# Altium PCB Routed BOARD 3.pcbdoc (part 1 of 7)
Units mil, origin at the board's own origin, x right, y up, seen from the top; angles counter-clockwise.
Board outline 6225 x 7025 mil, 8 copper layers (TopLayer, MidLayer1, MidLayer2, MidLayer3, MidLayer4, MidLayer5, MidLayer6, BottomLayer); 253 components, 548 nets, 2588 pads, 2014 vias.
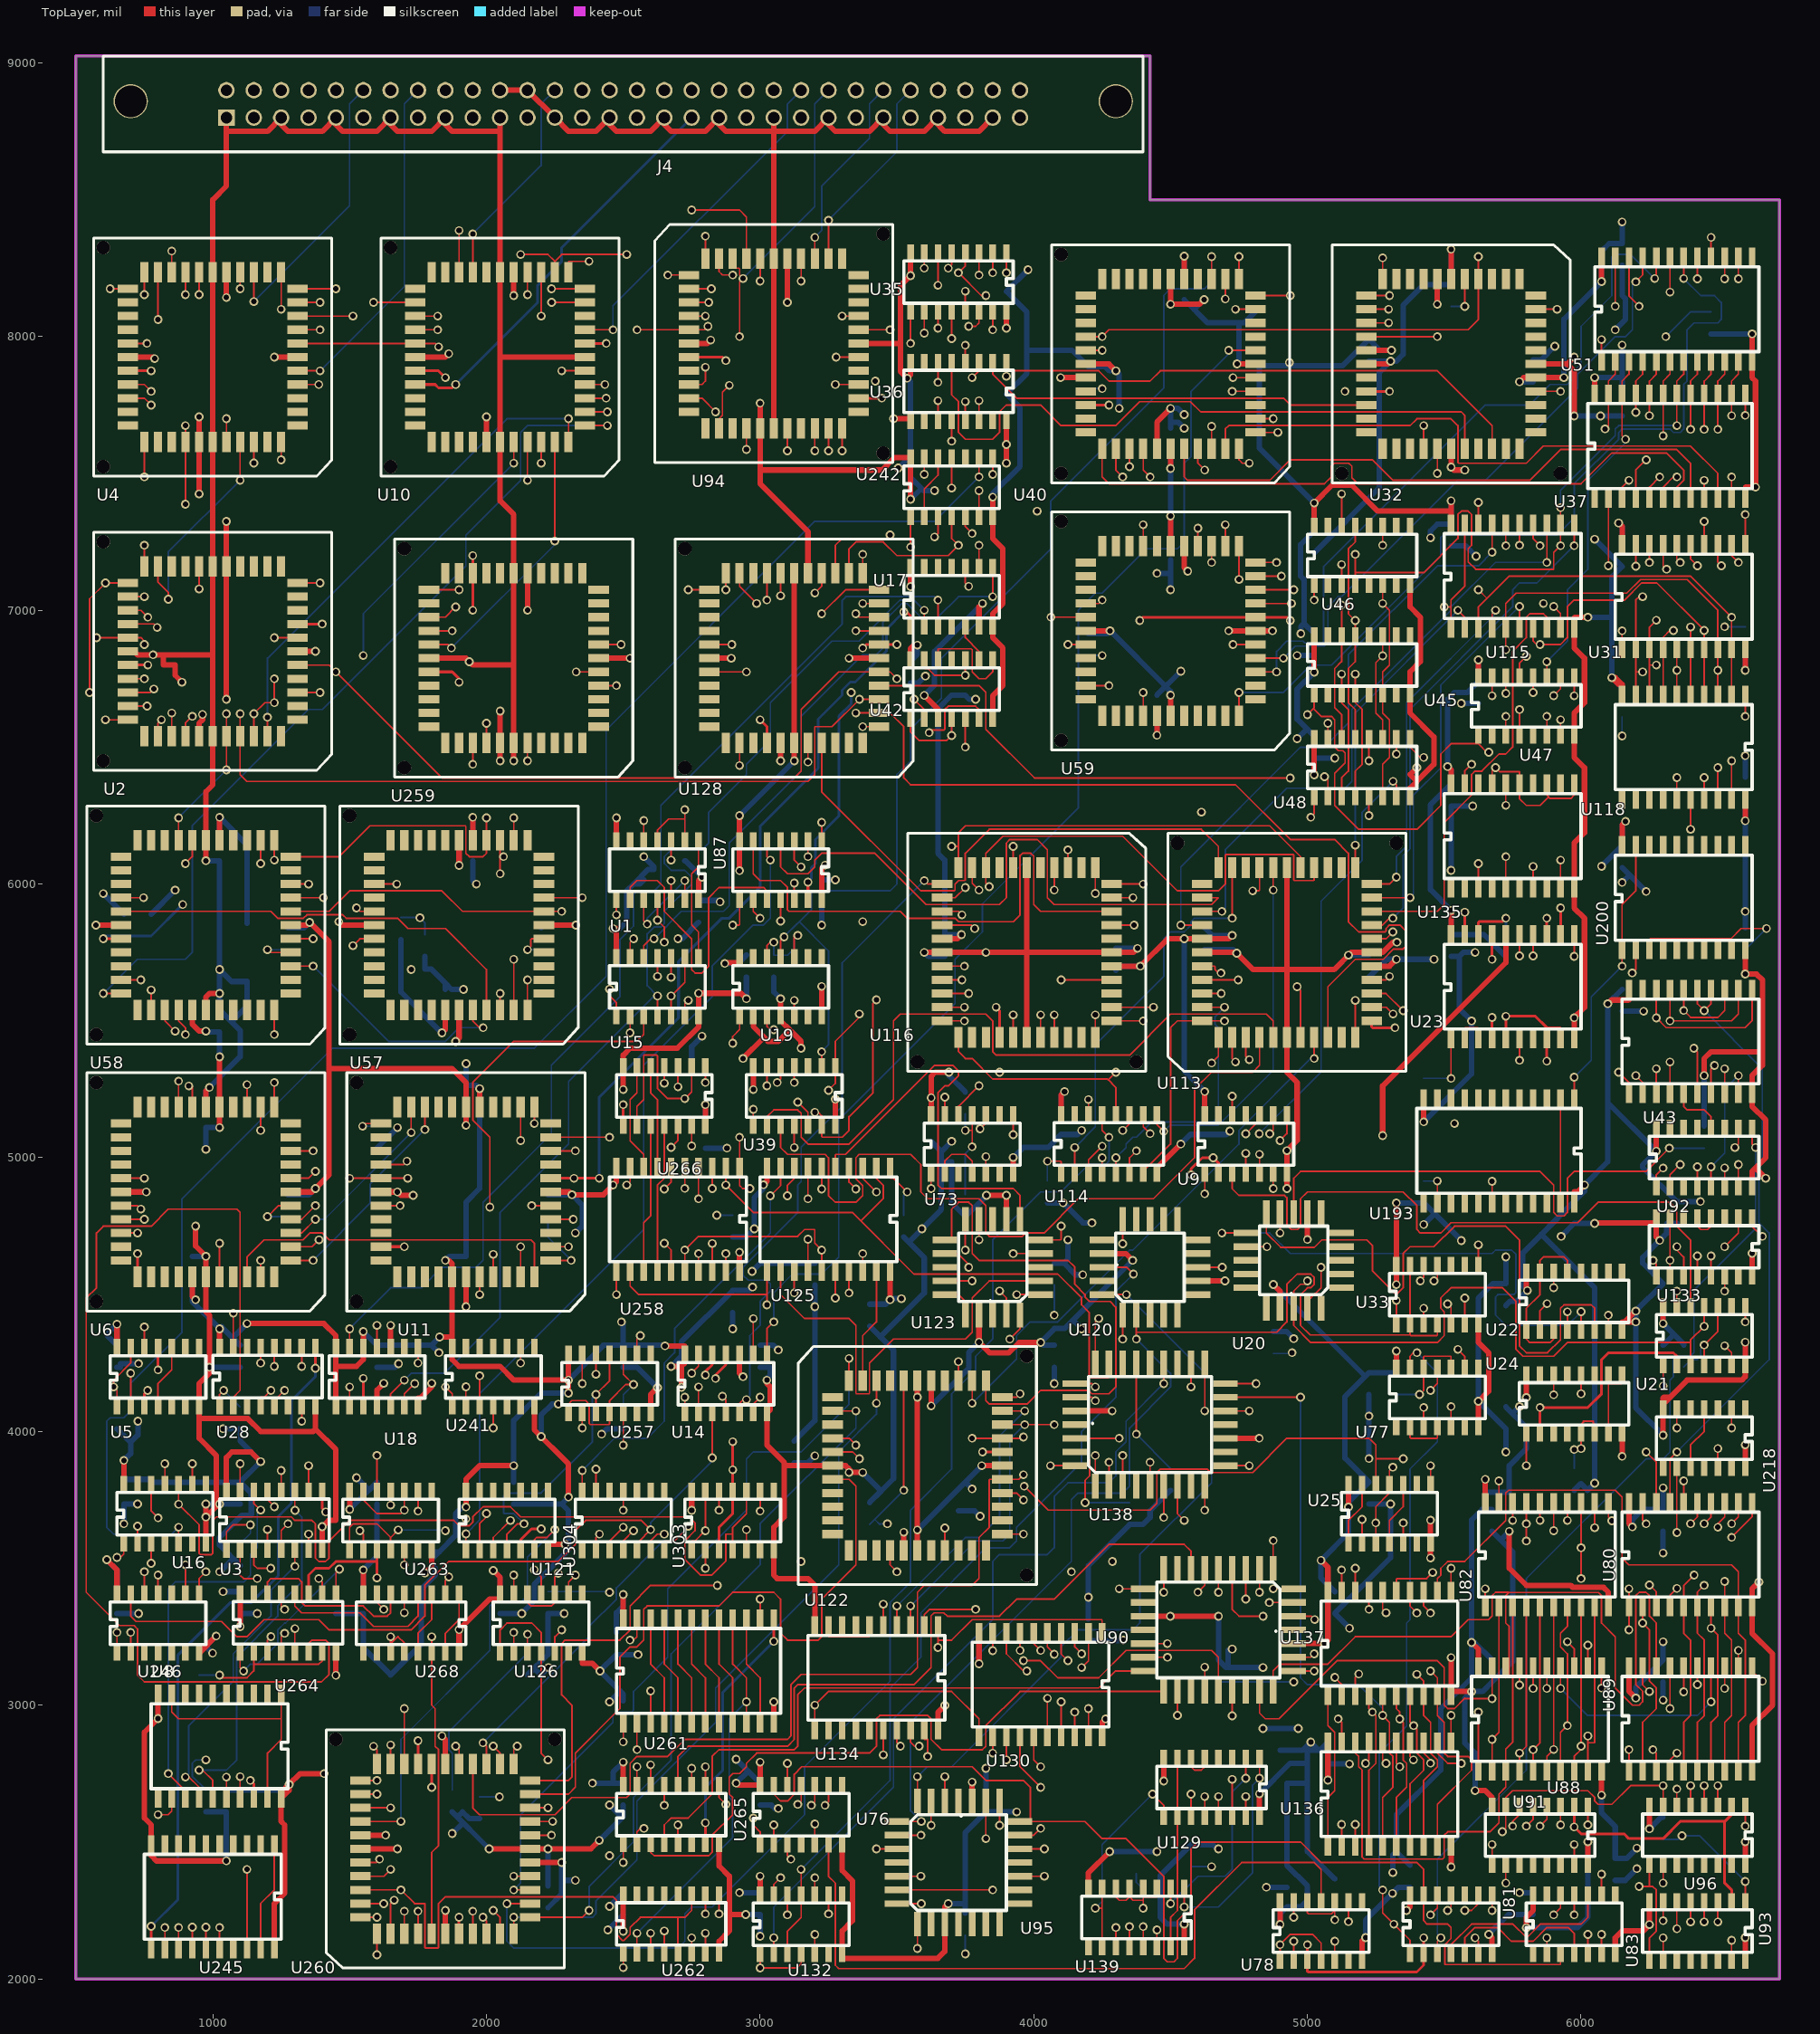
[diagram p0: TopLayer view]
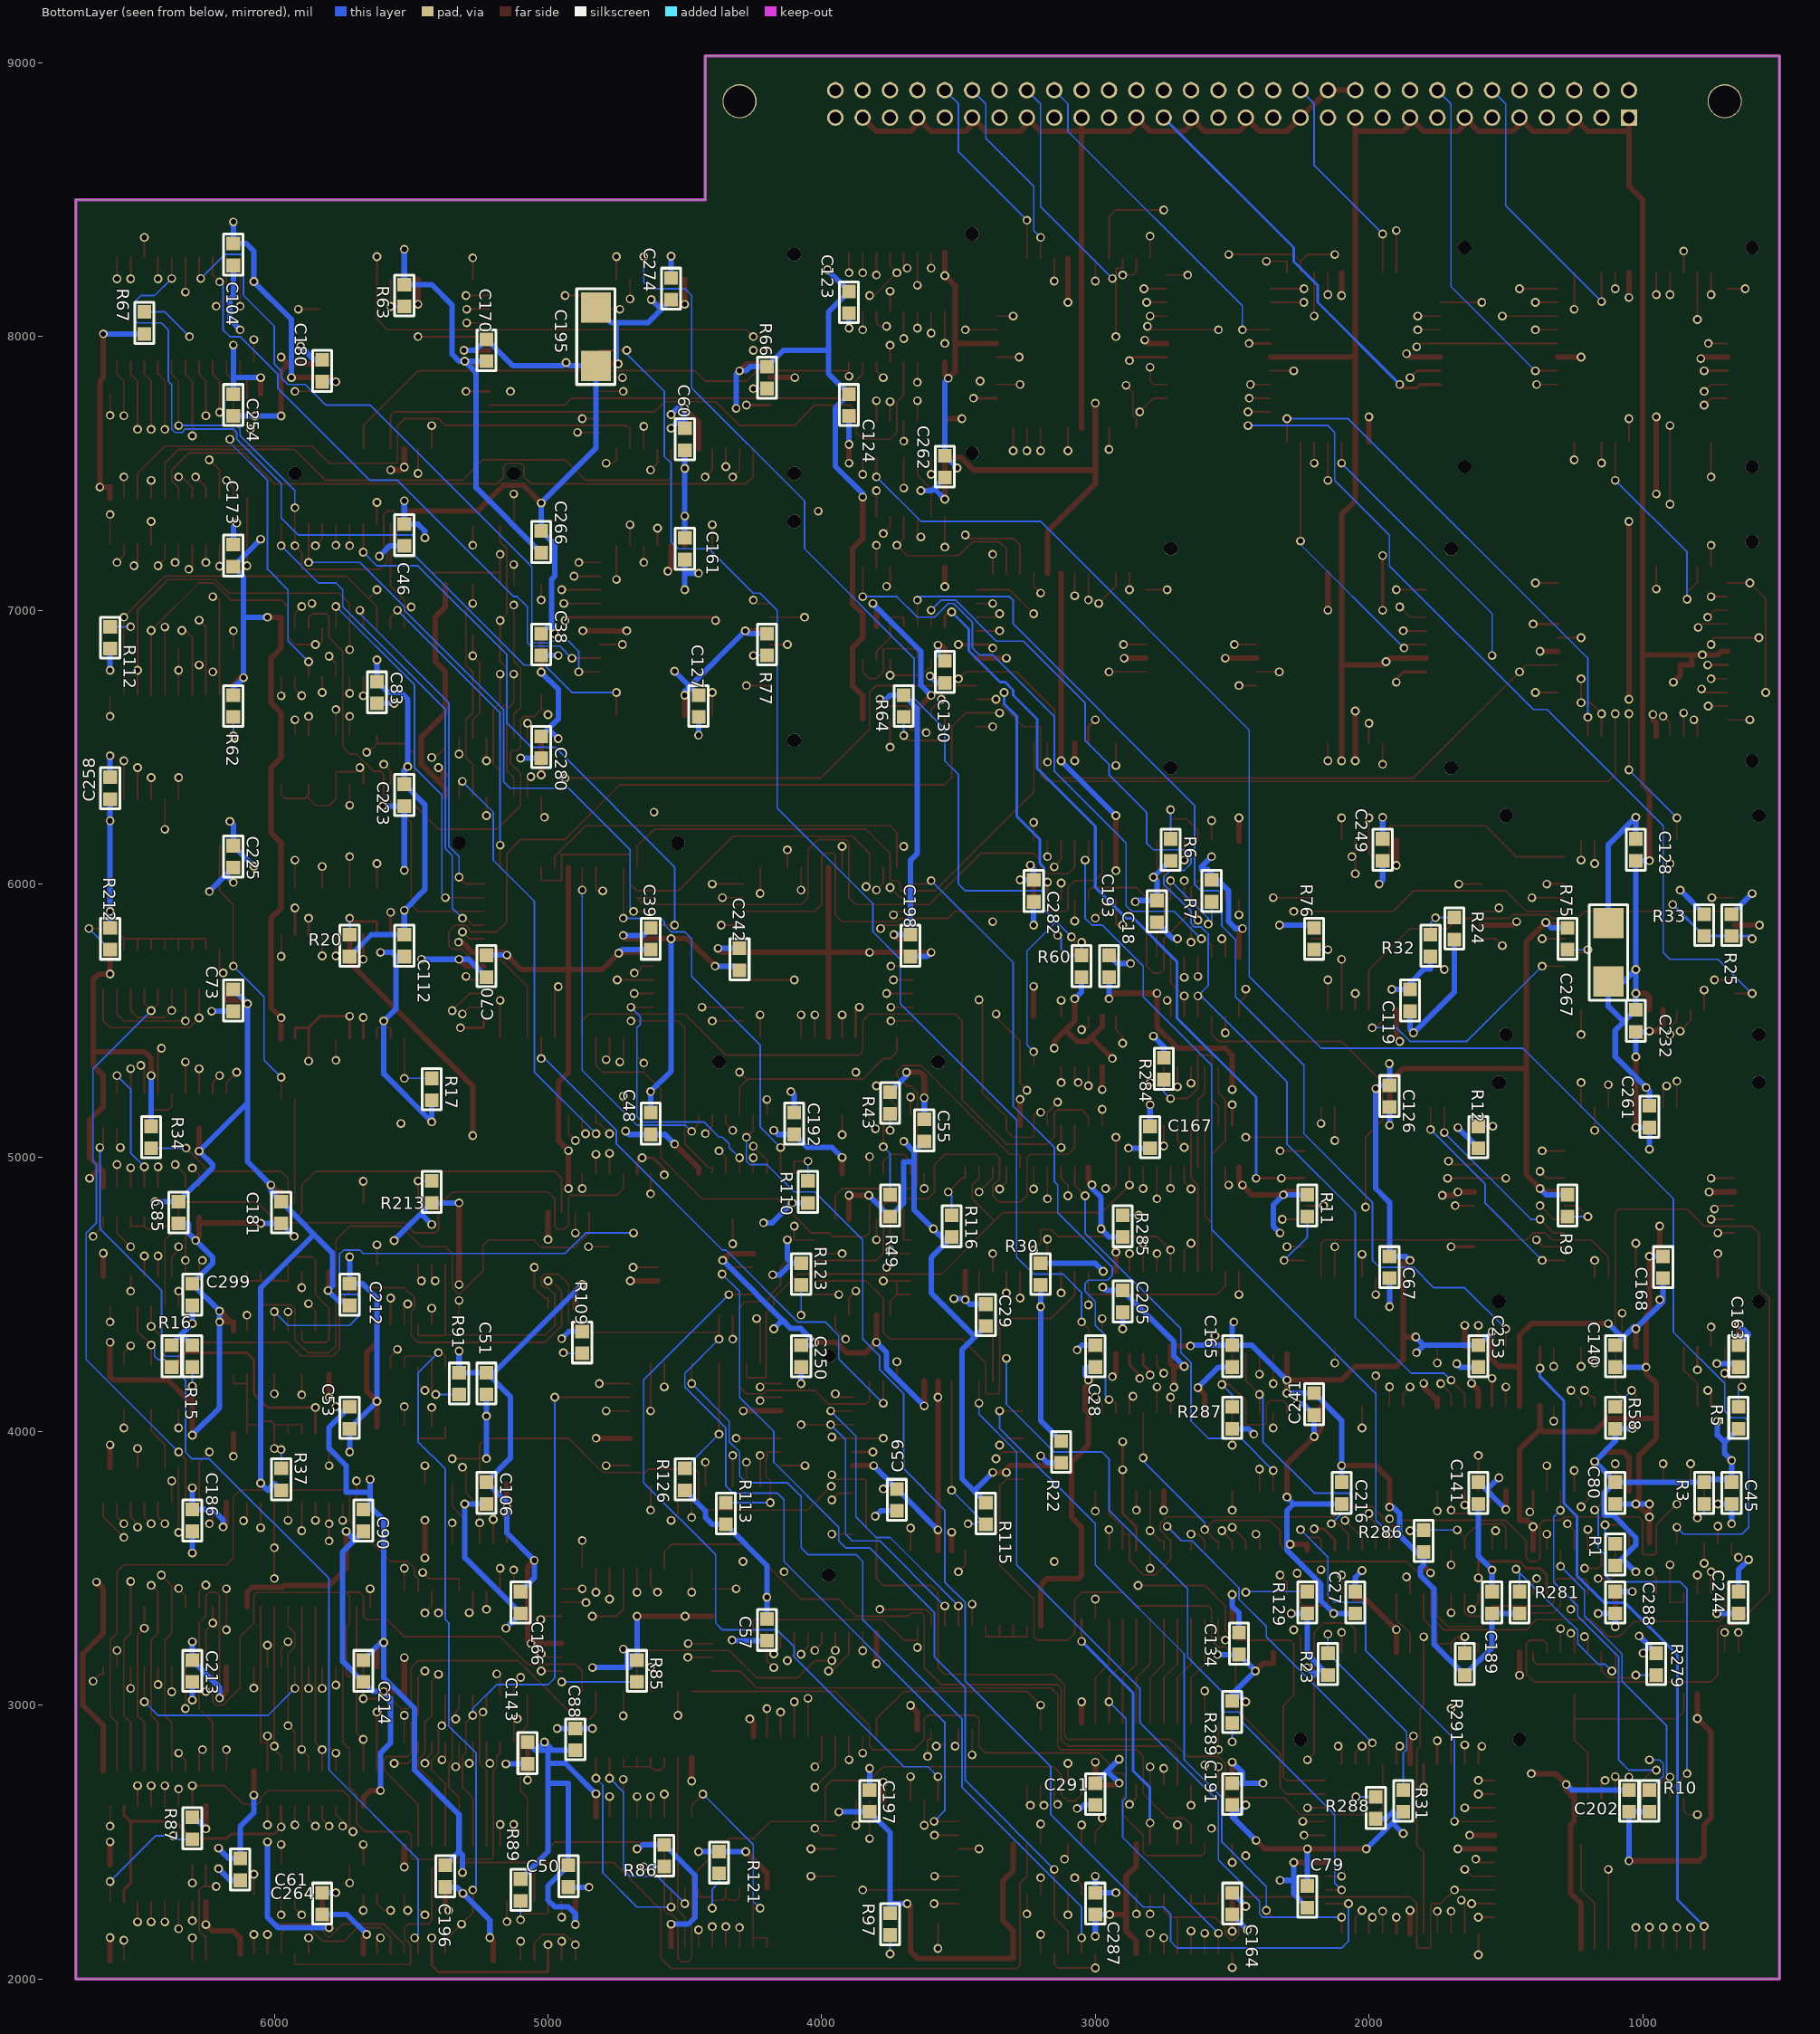
[diagram p1: BottomLayer view, seen from below]
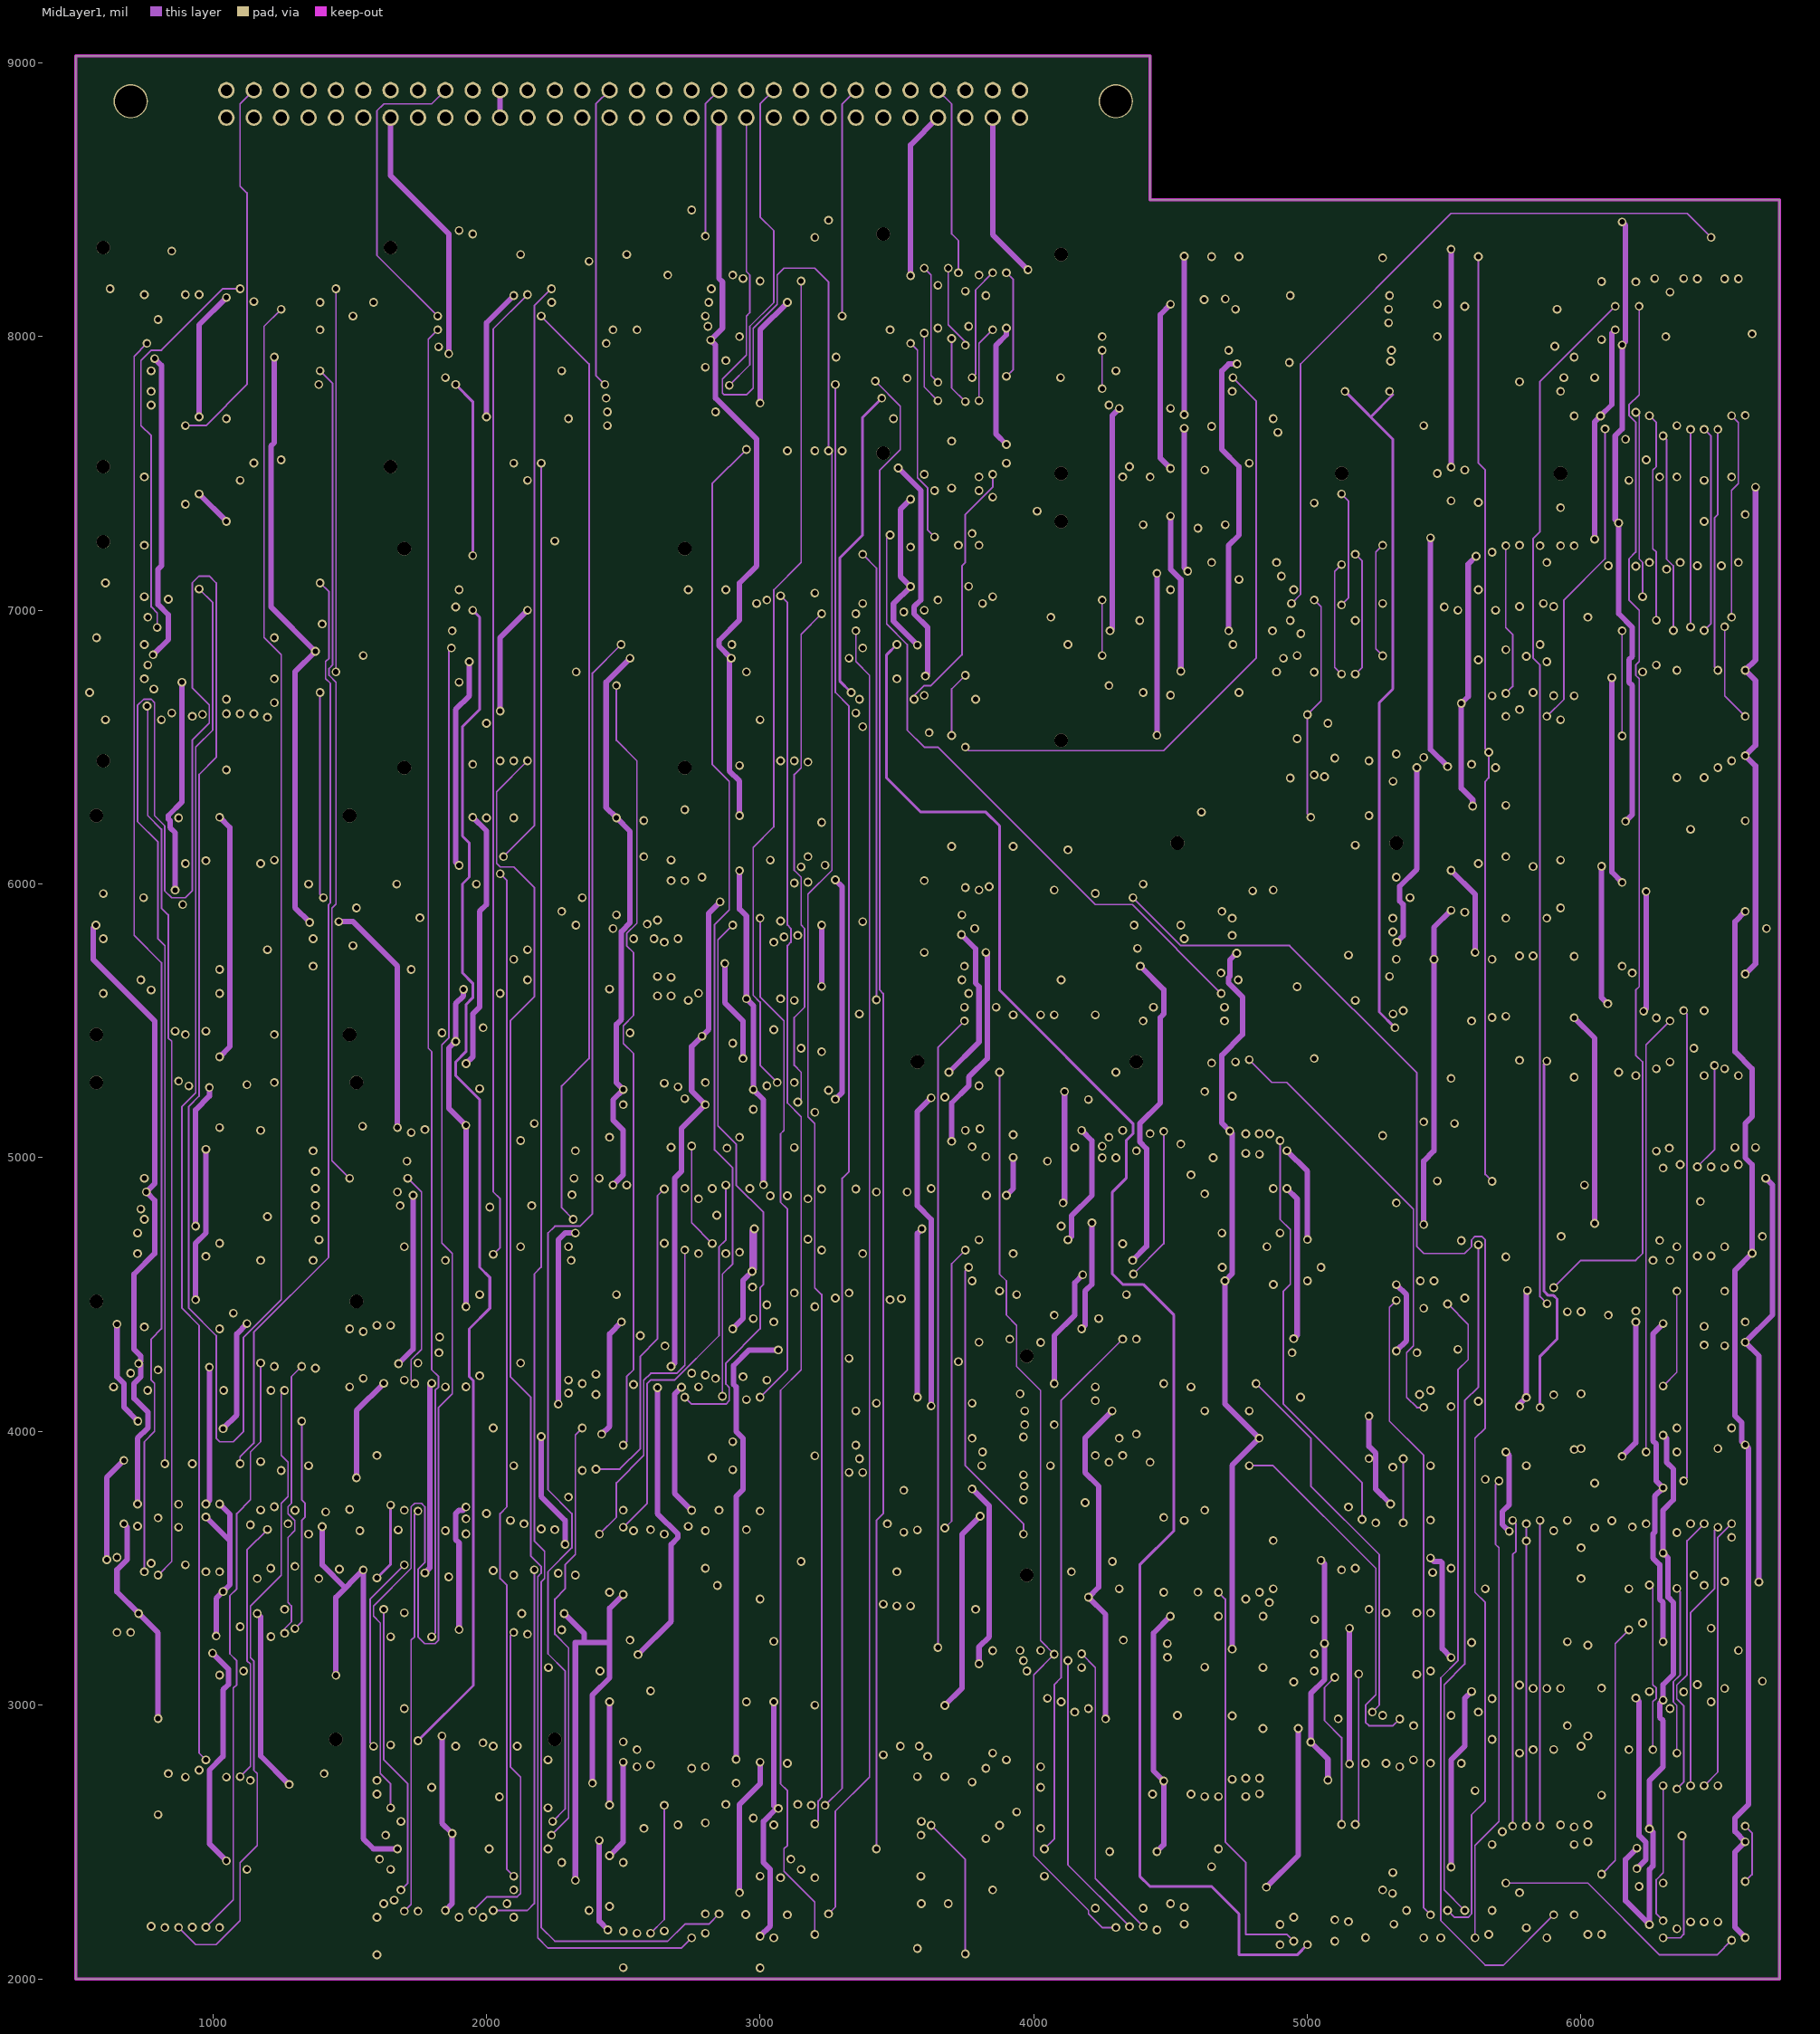
[diagram p2: MidLayer1]
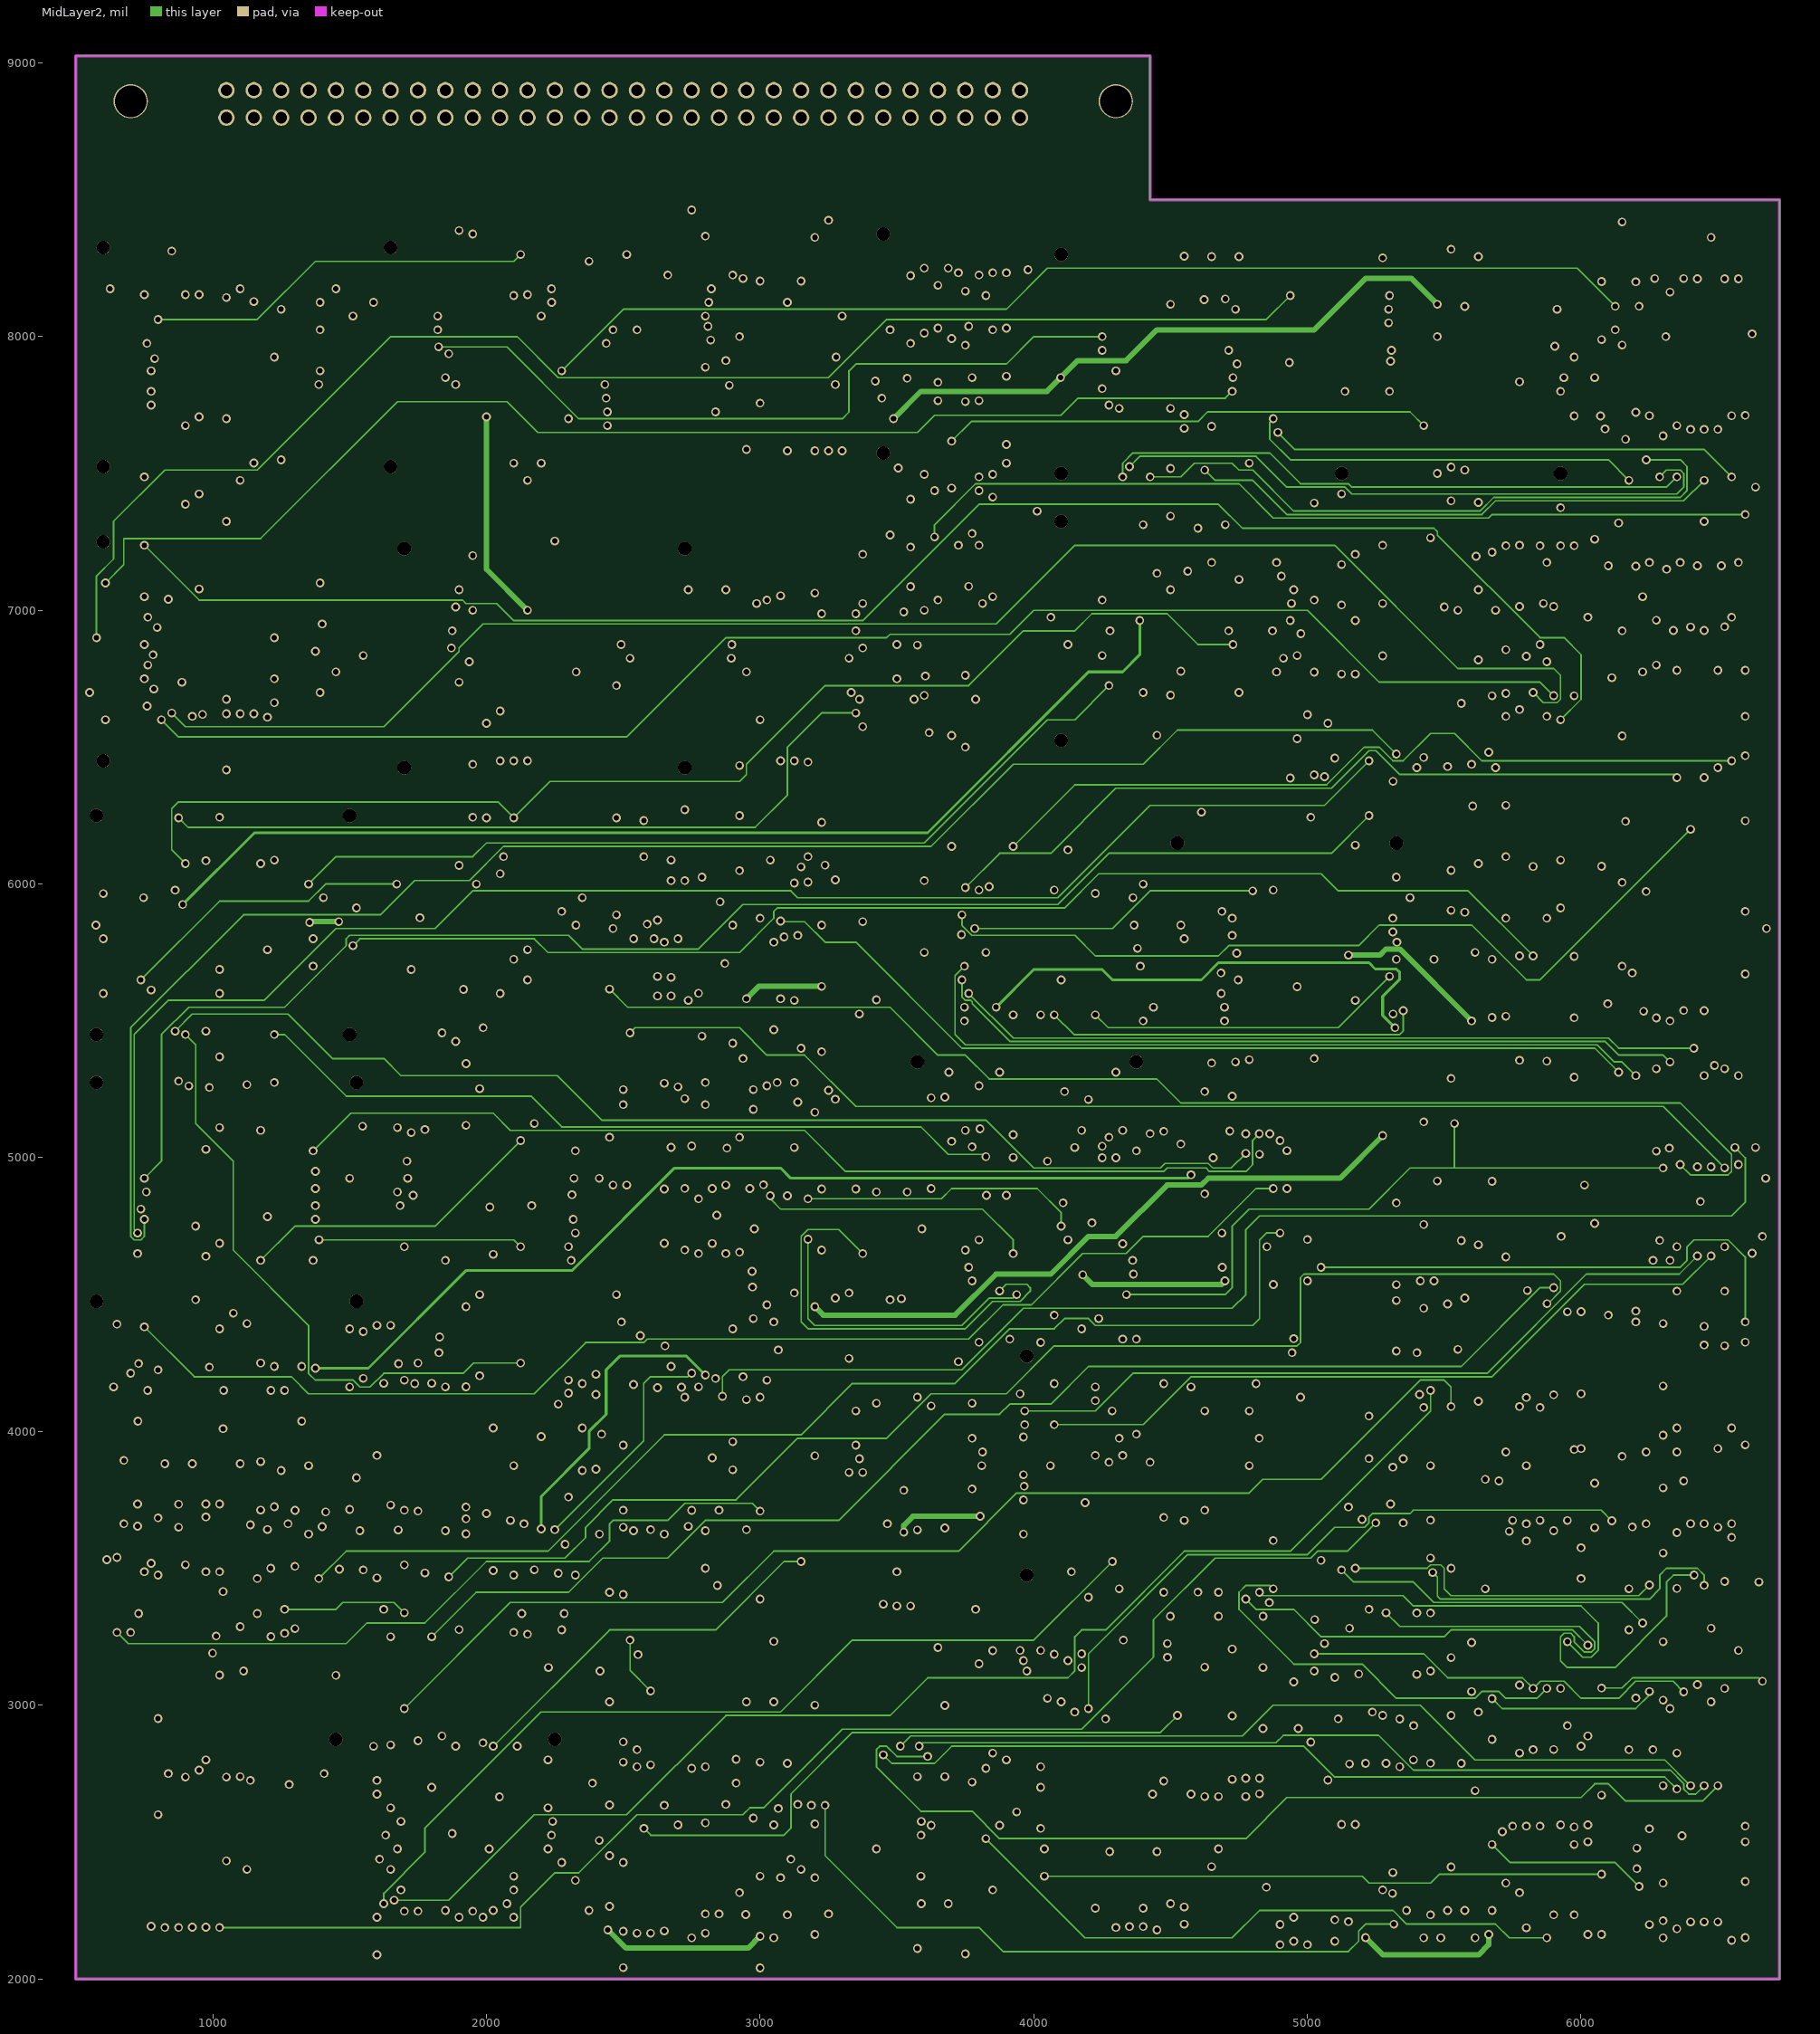
[diagram p3: MidLayer2]
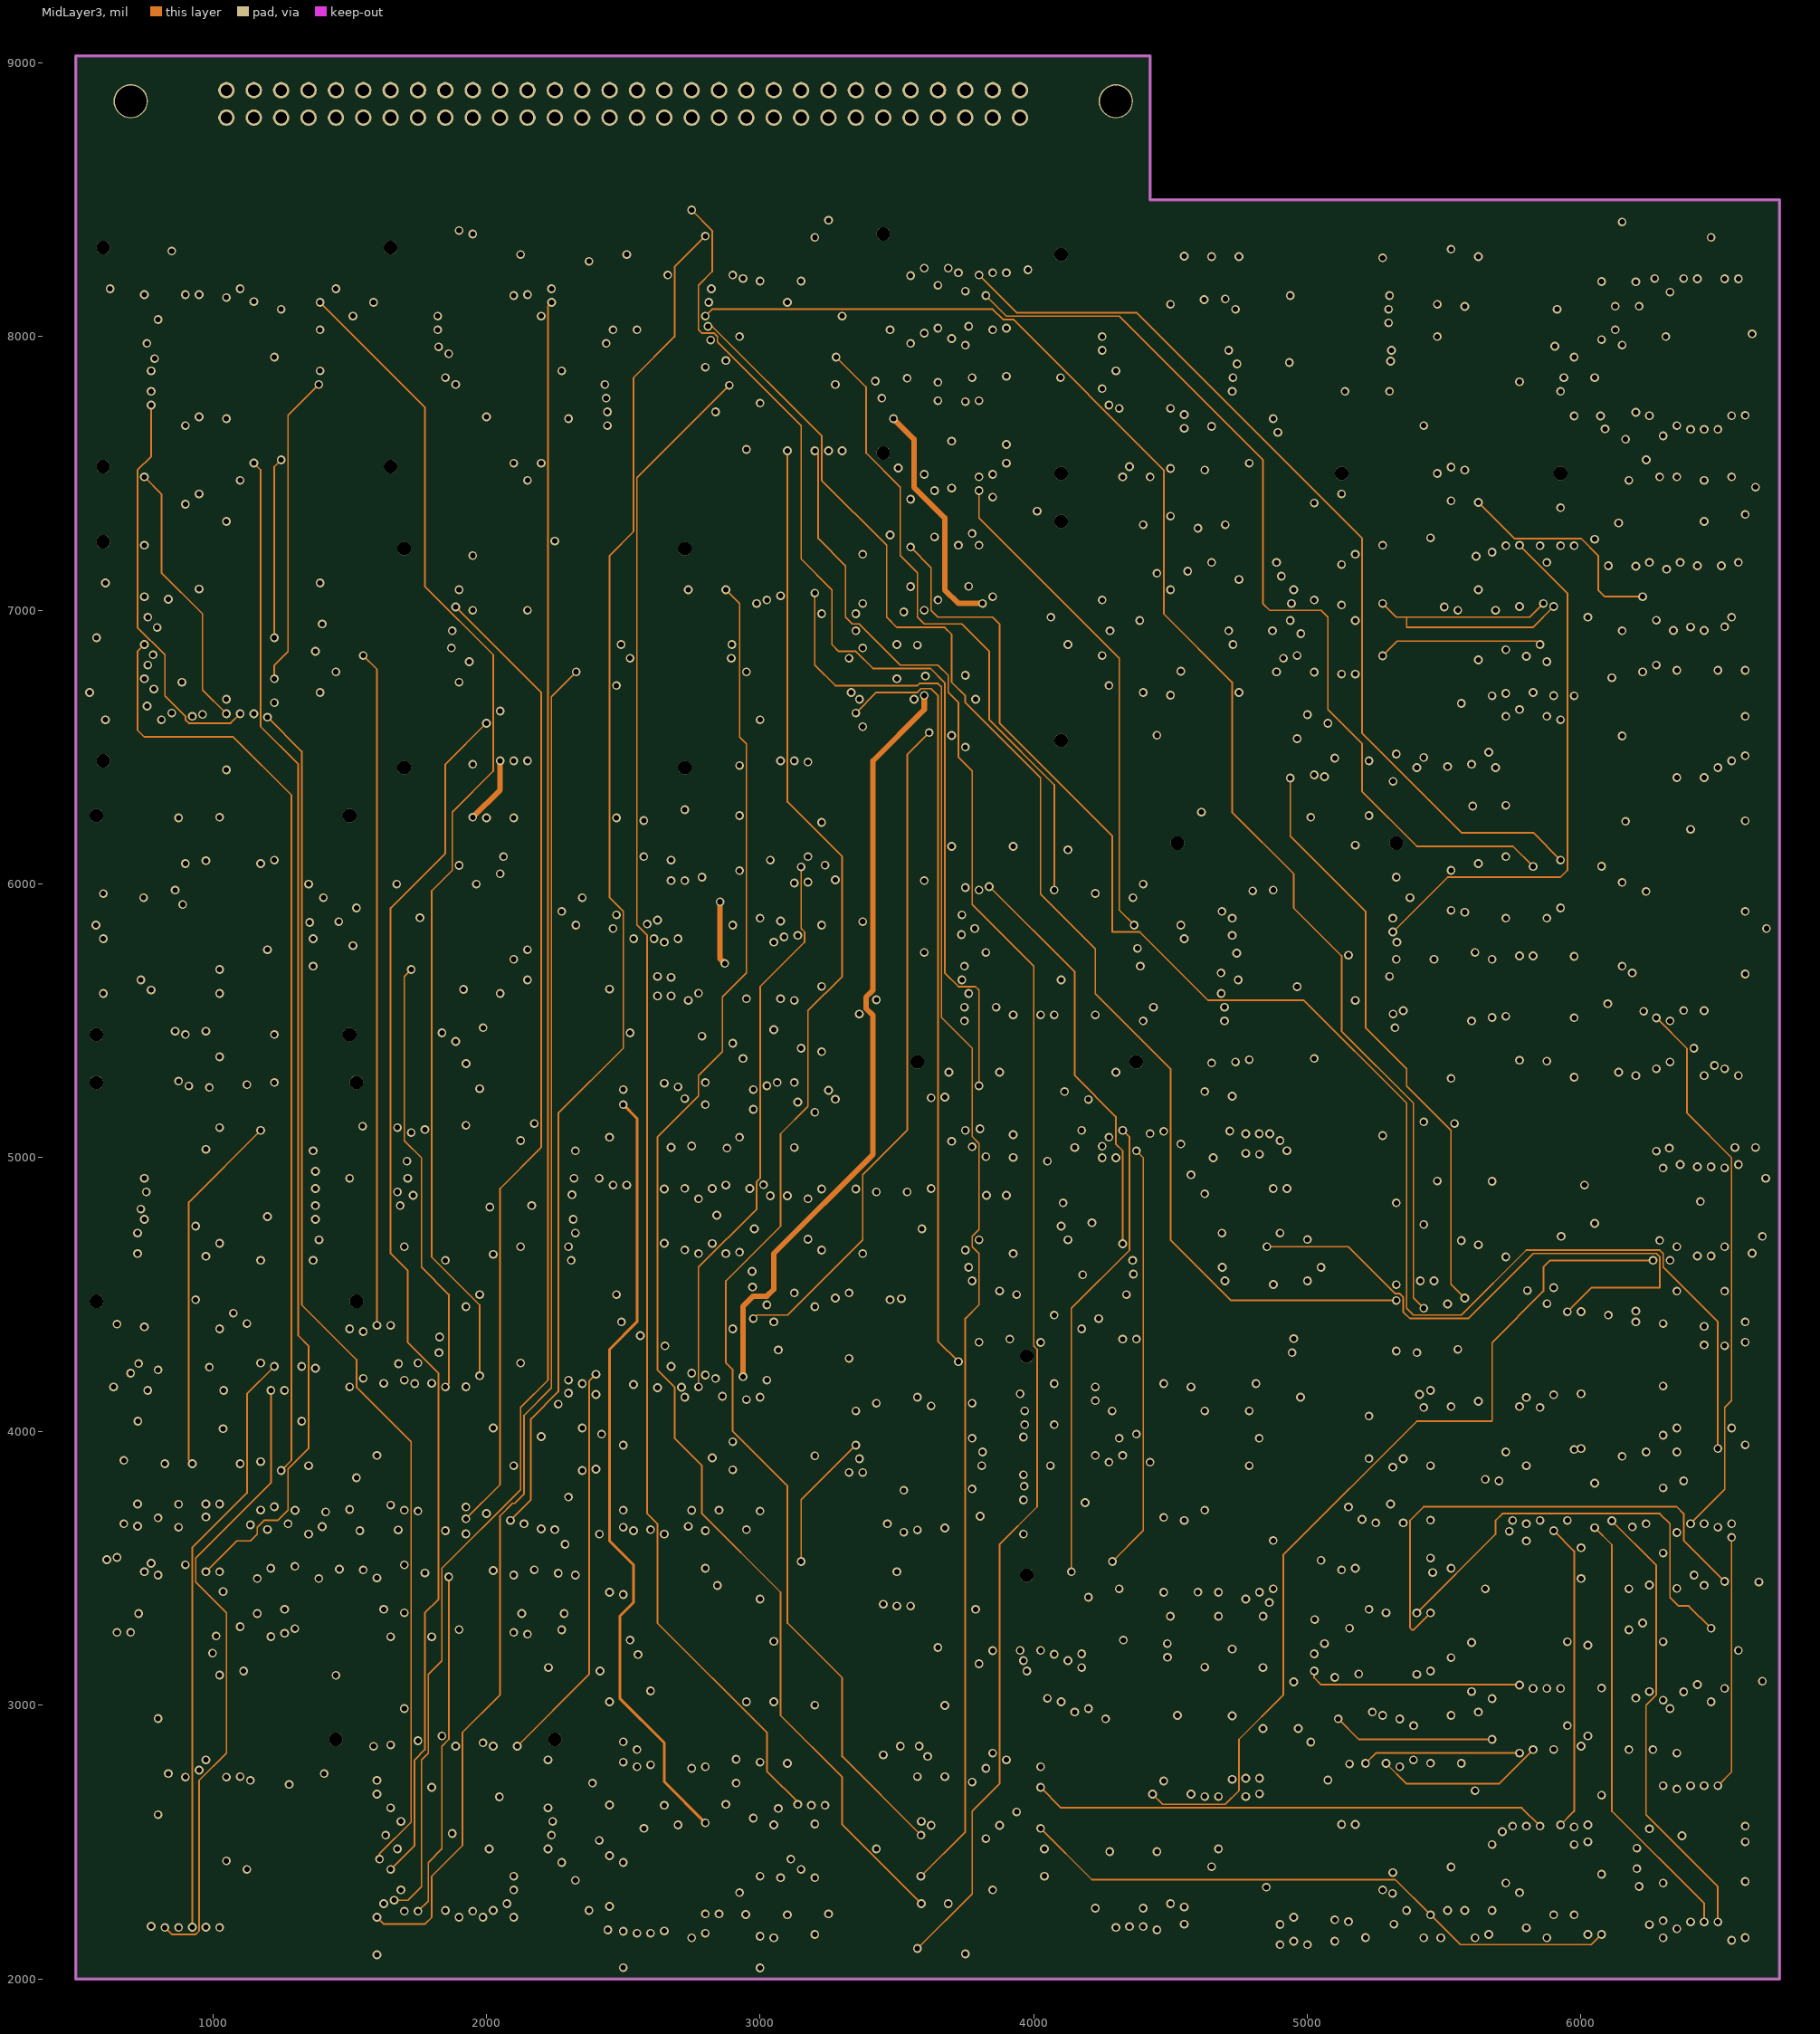
[diagram p4: MidLayer3]
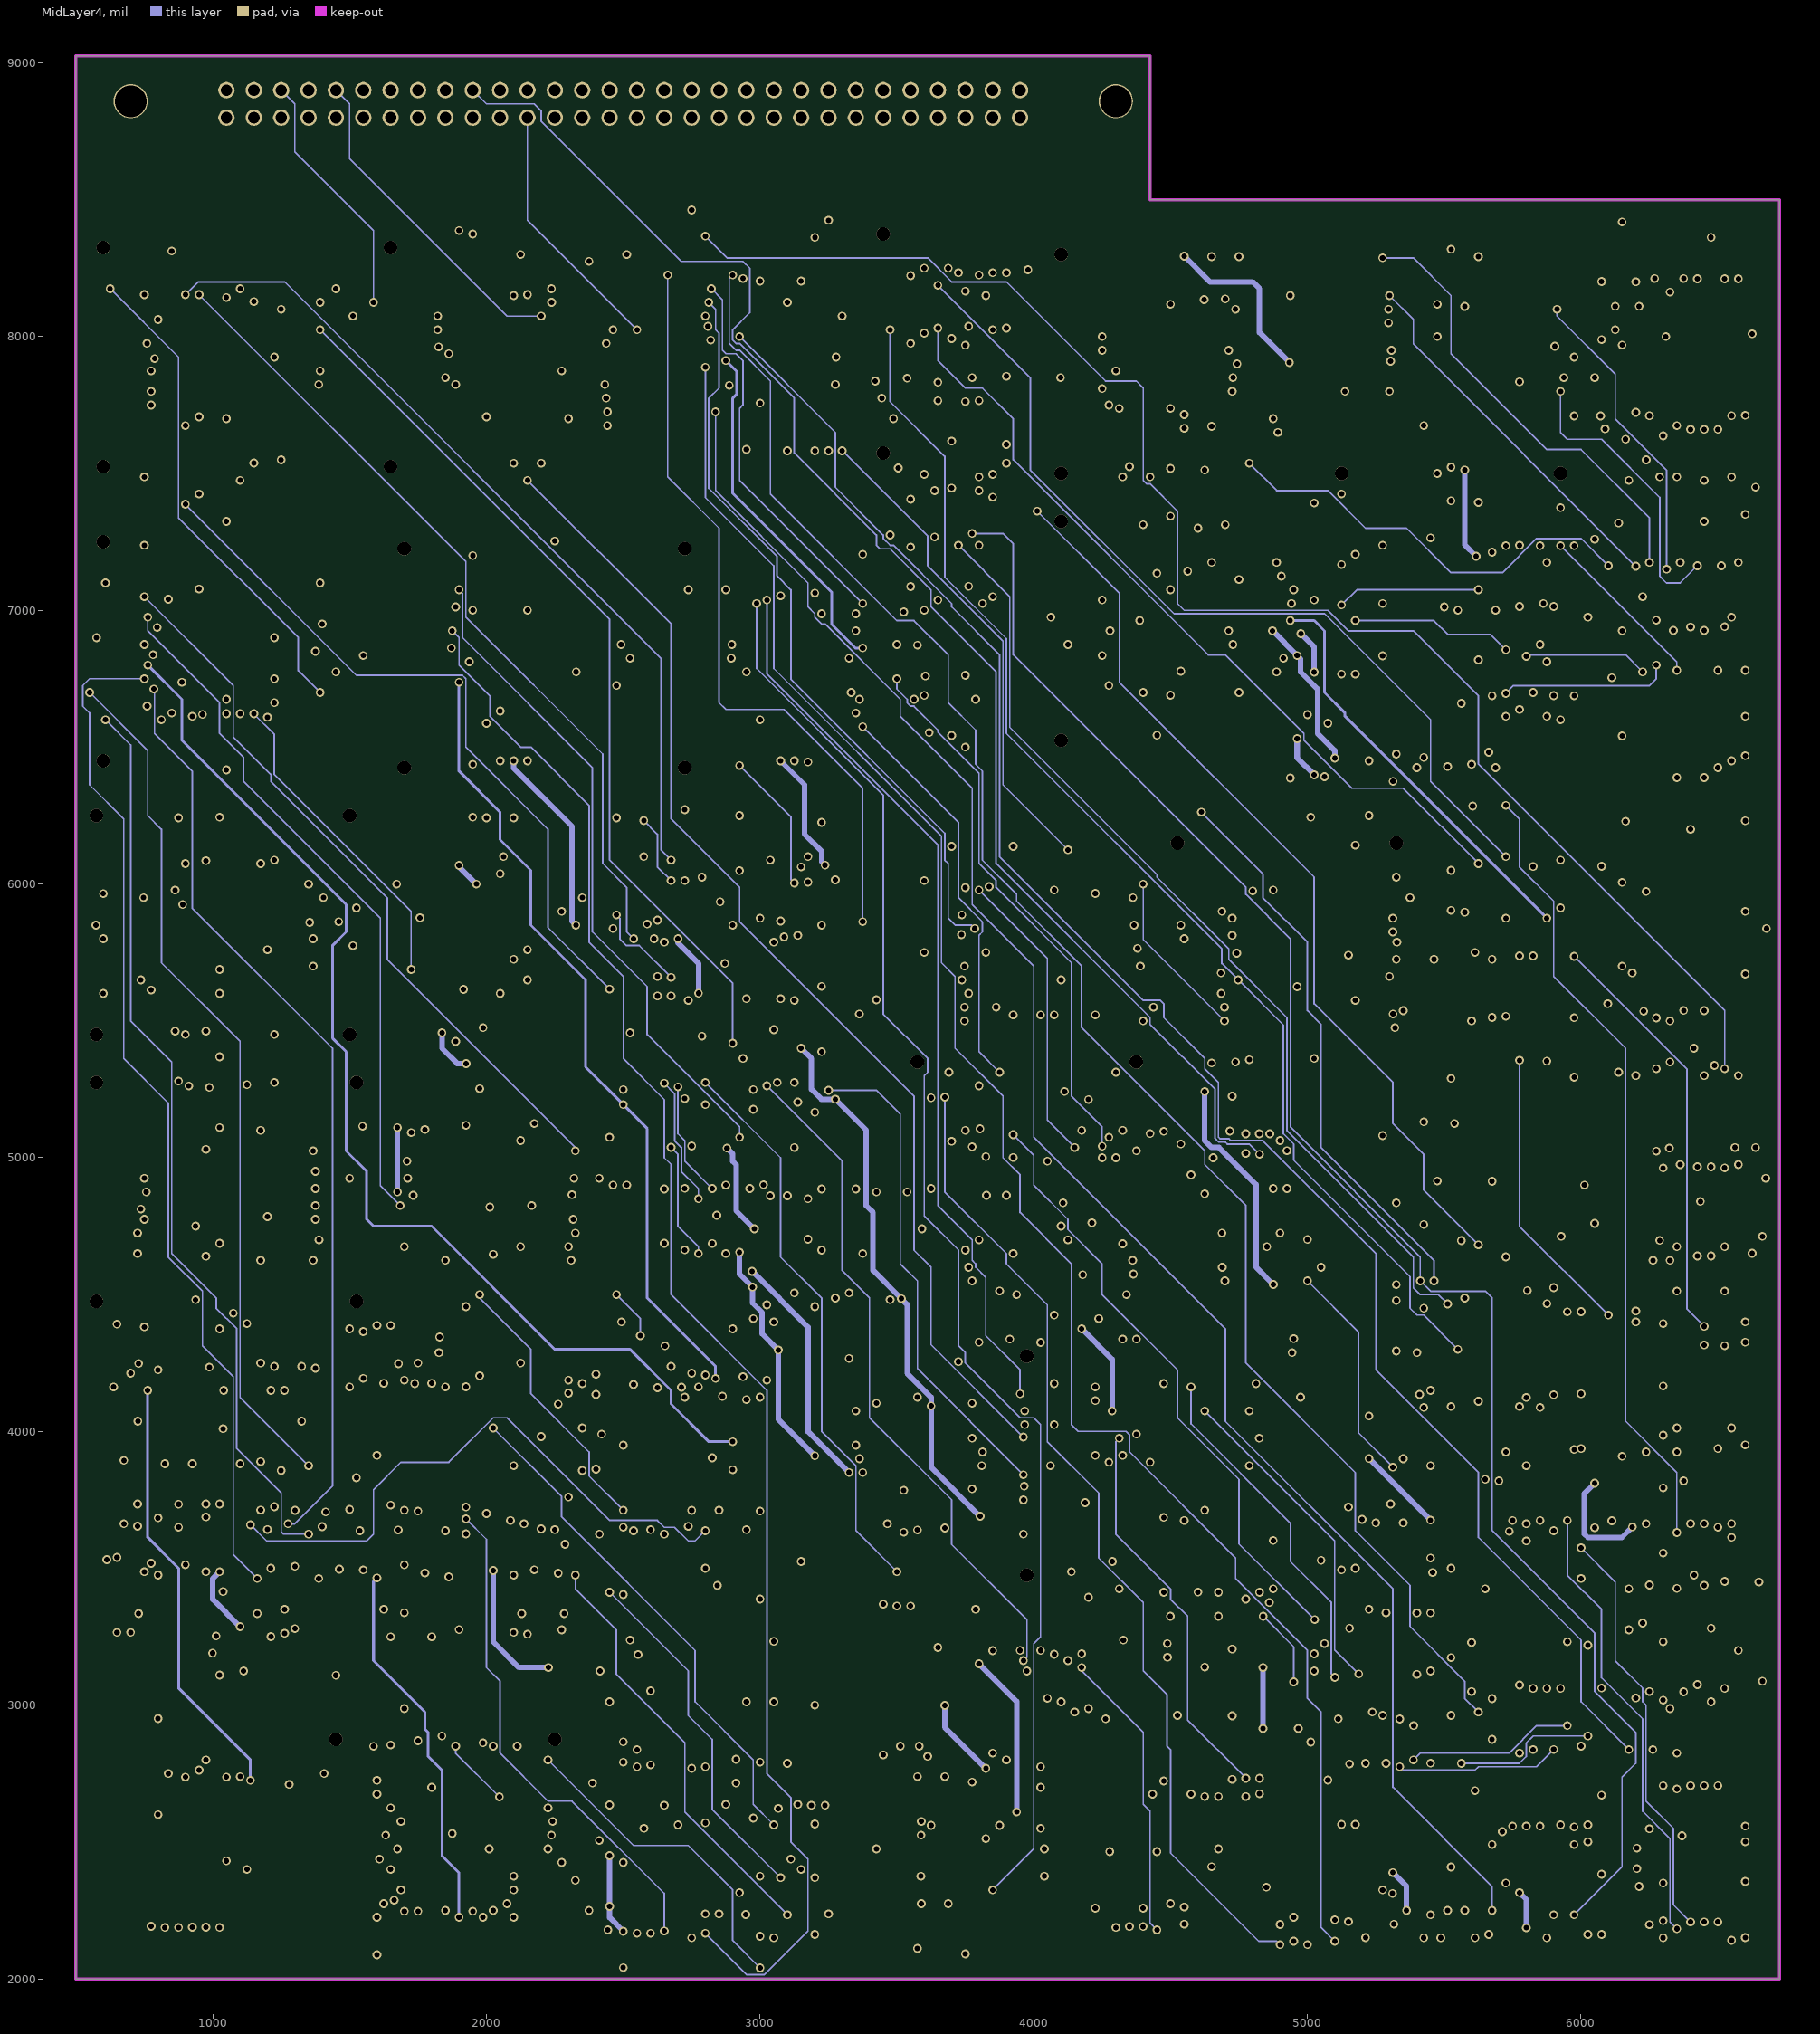
[diagram p5: MidLayer4]
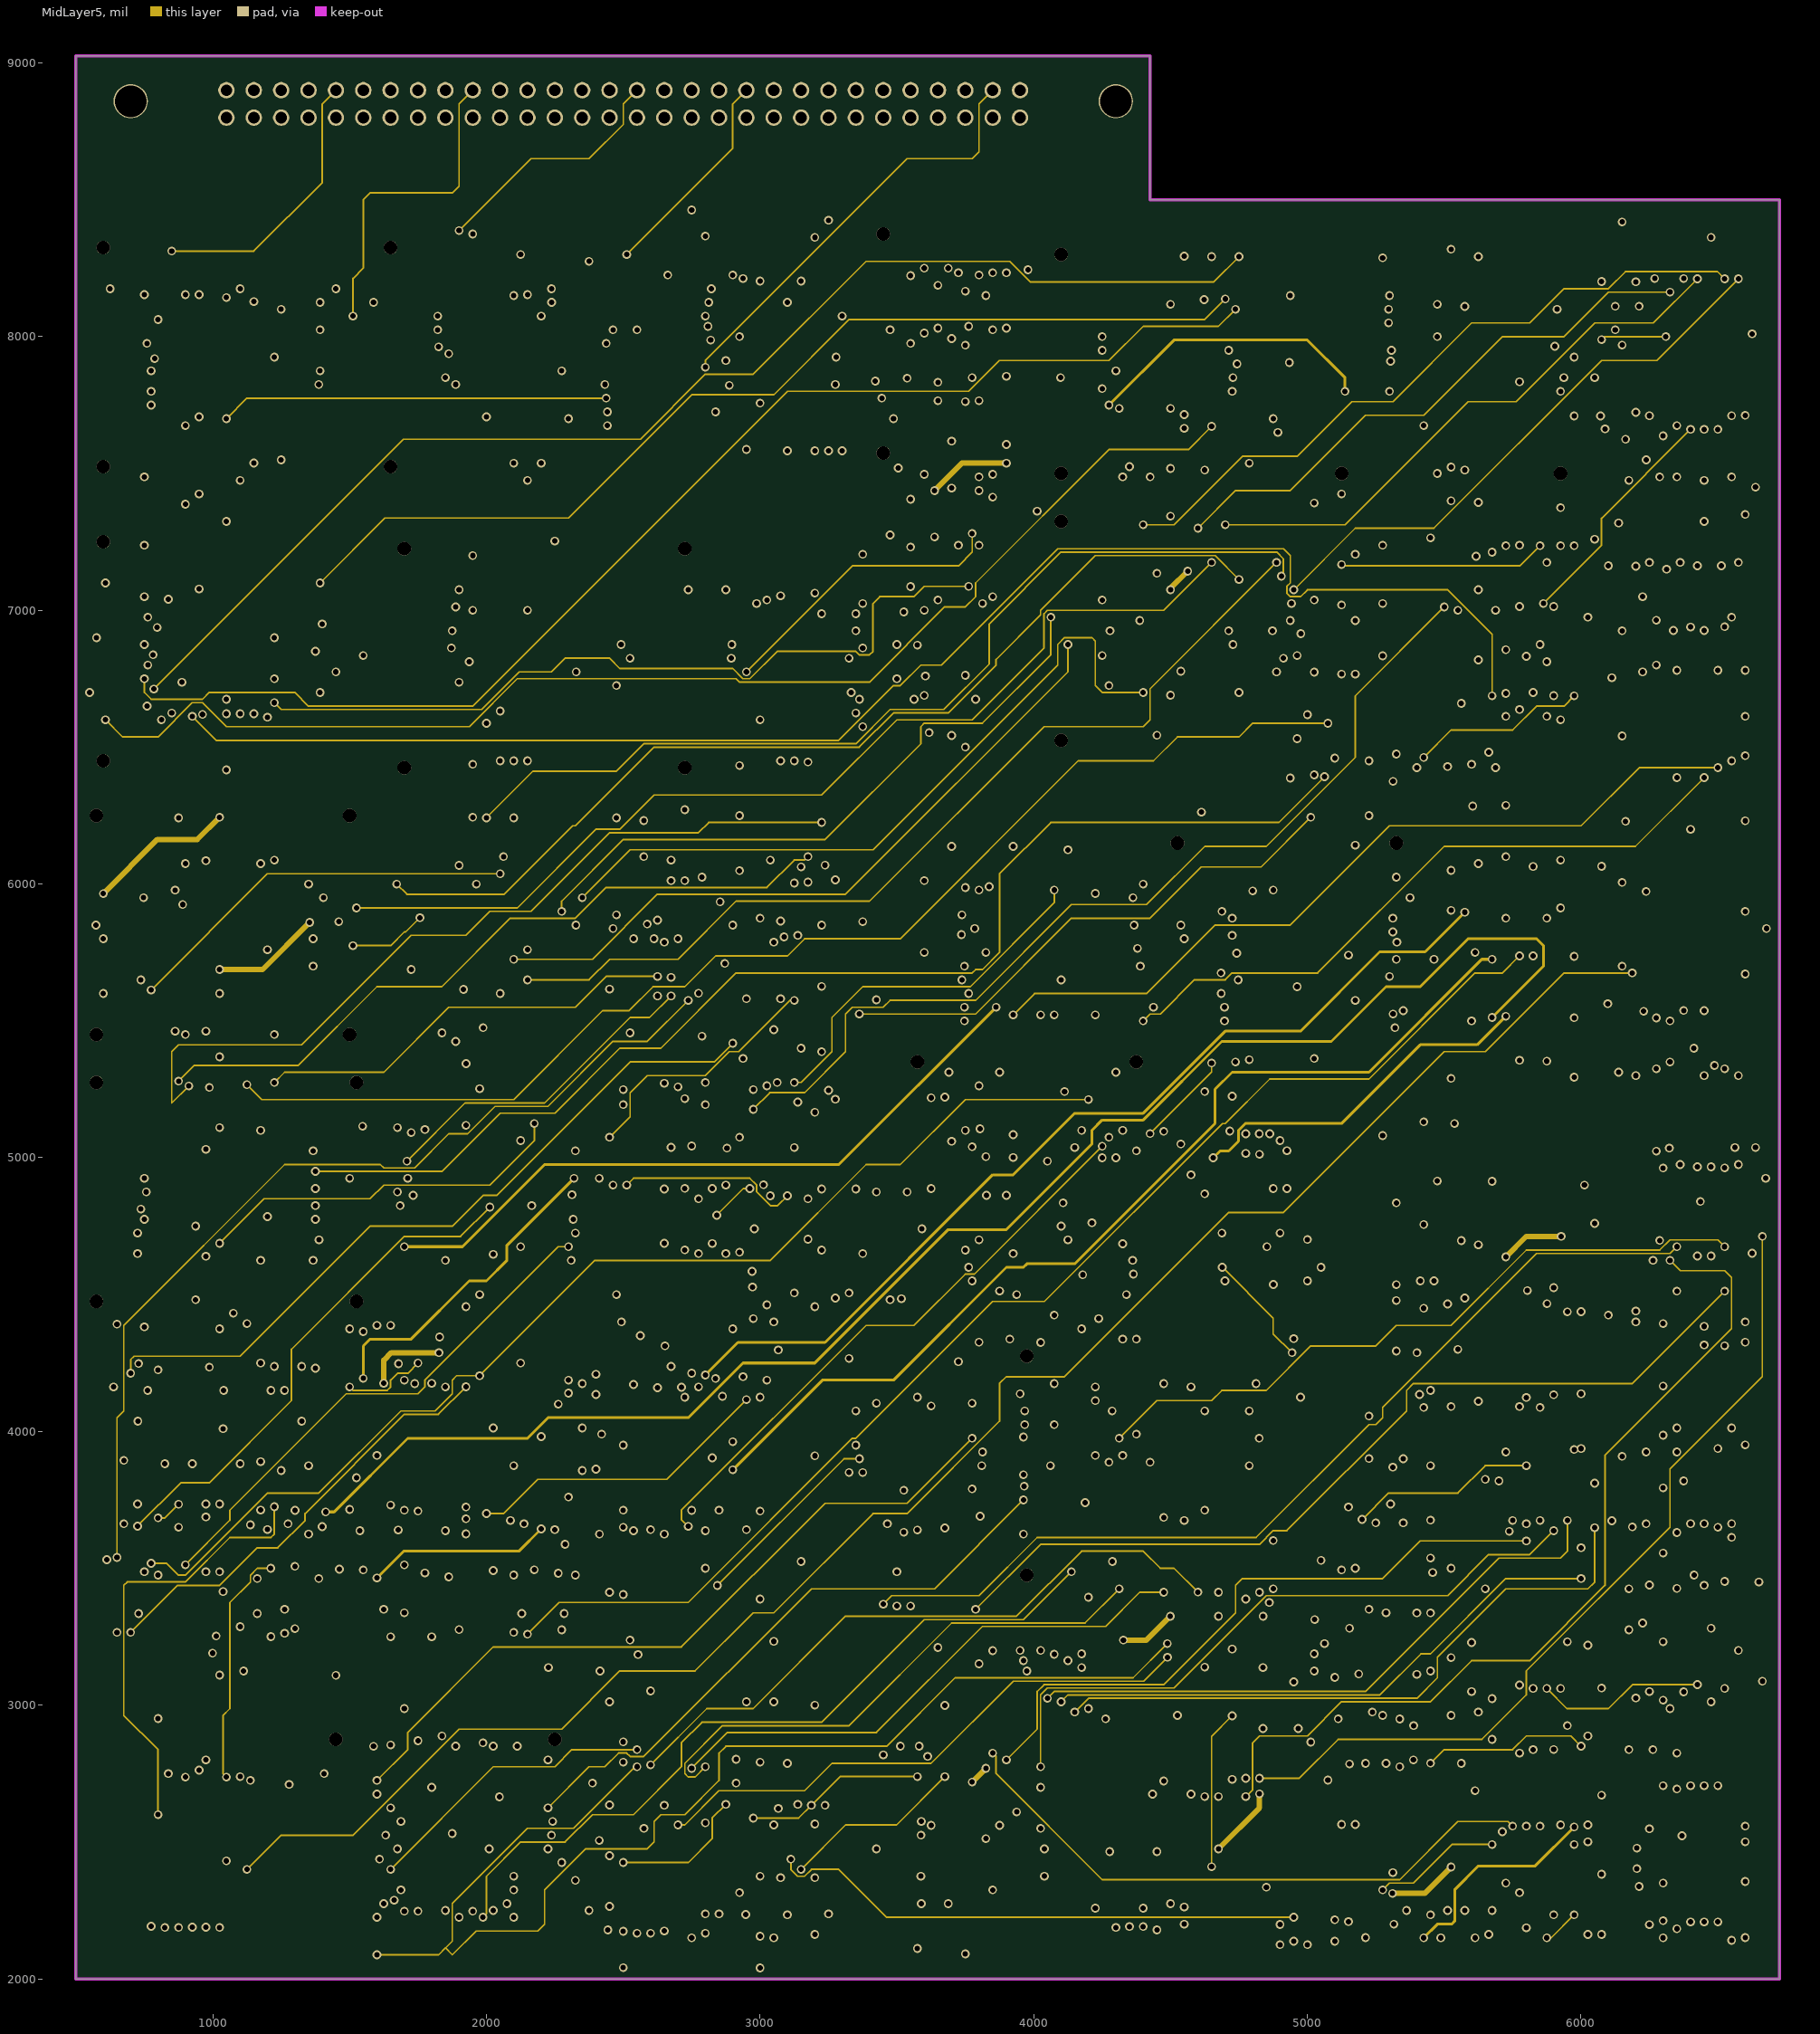
[diagram p6: MidLayer5]
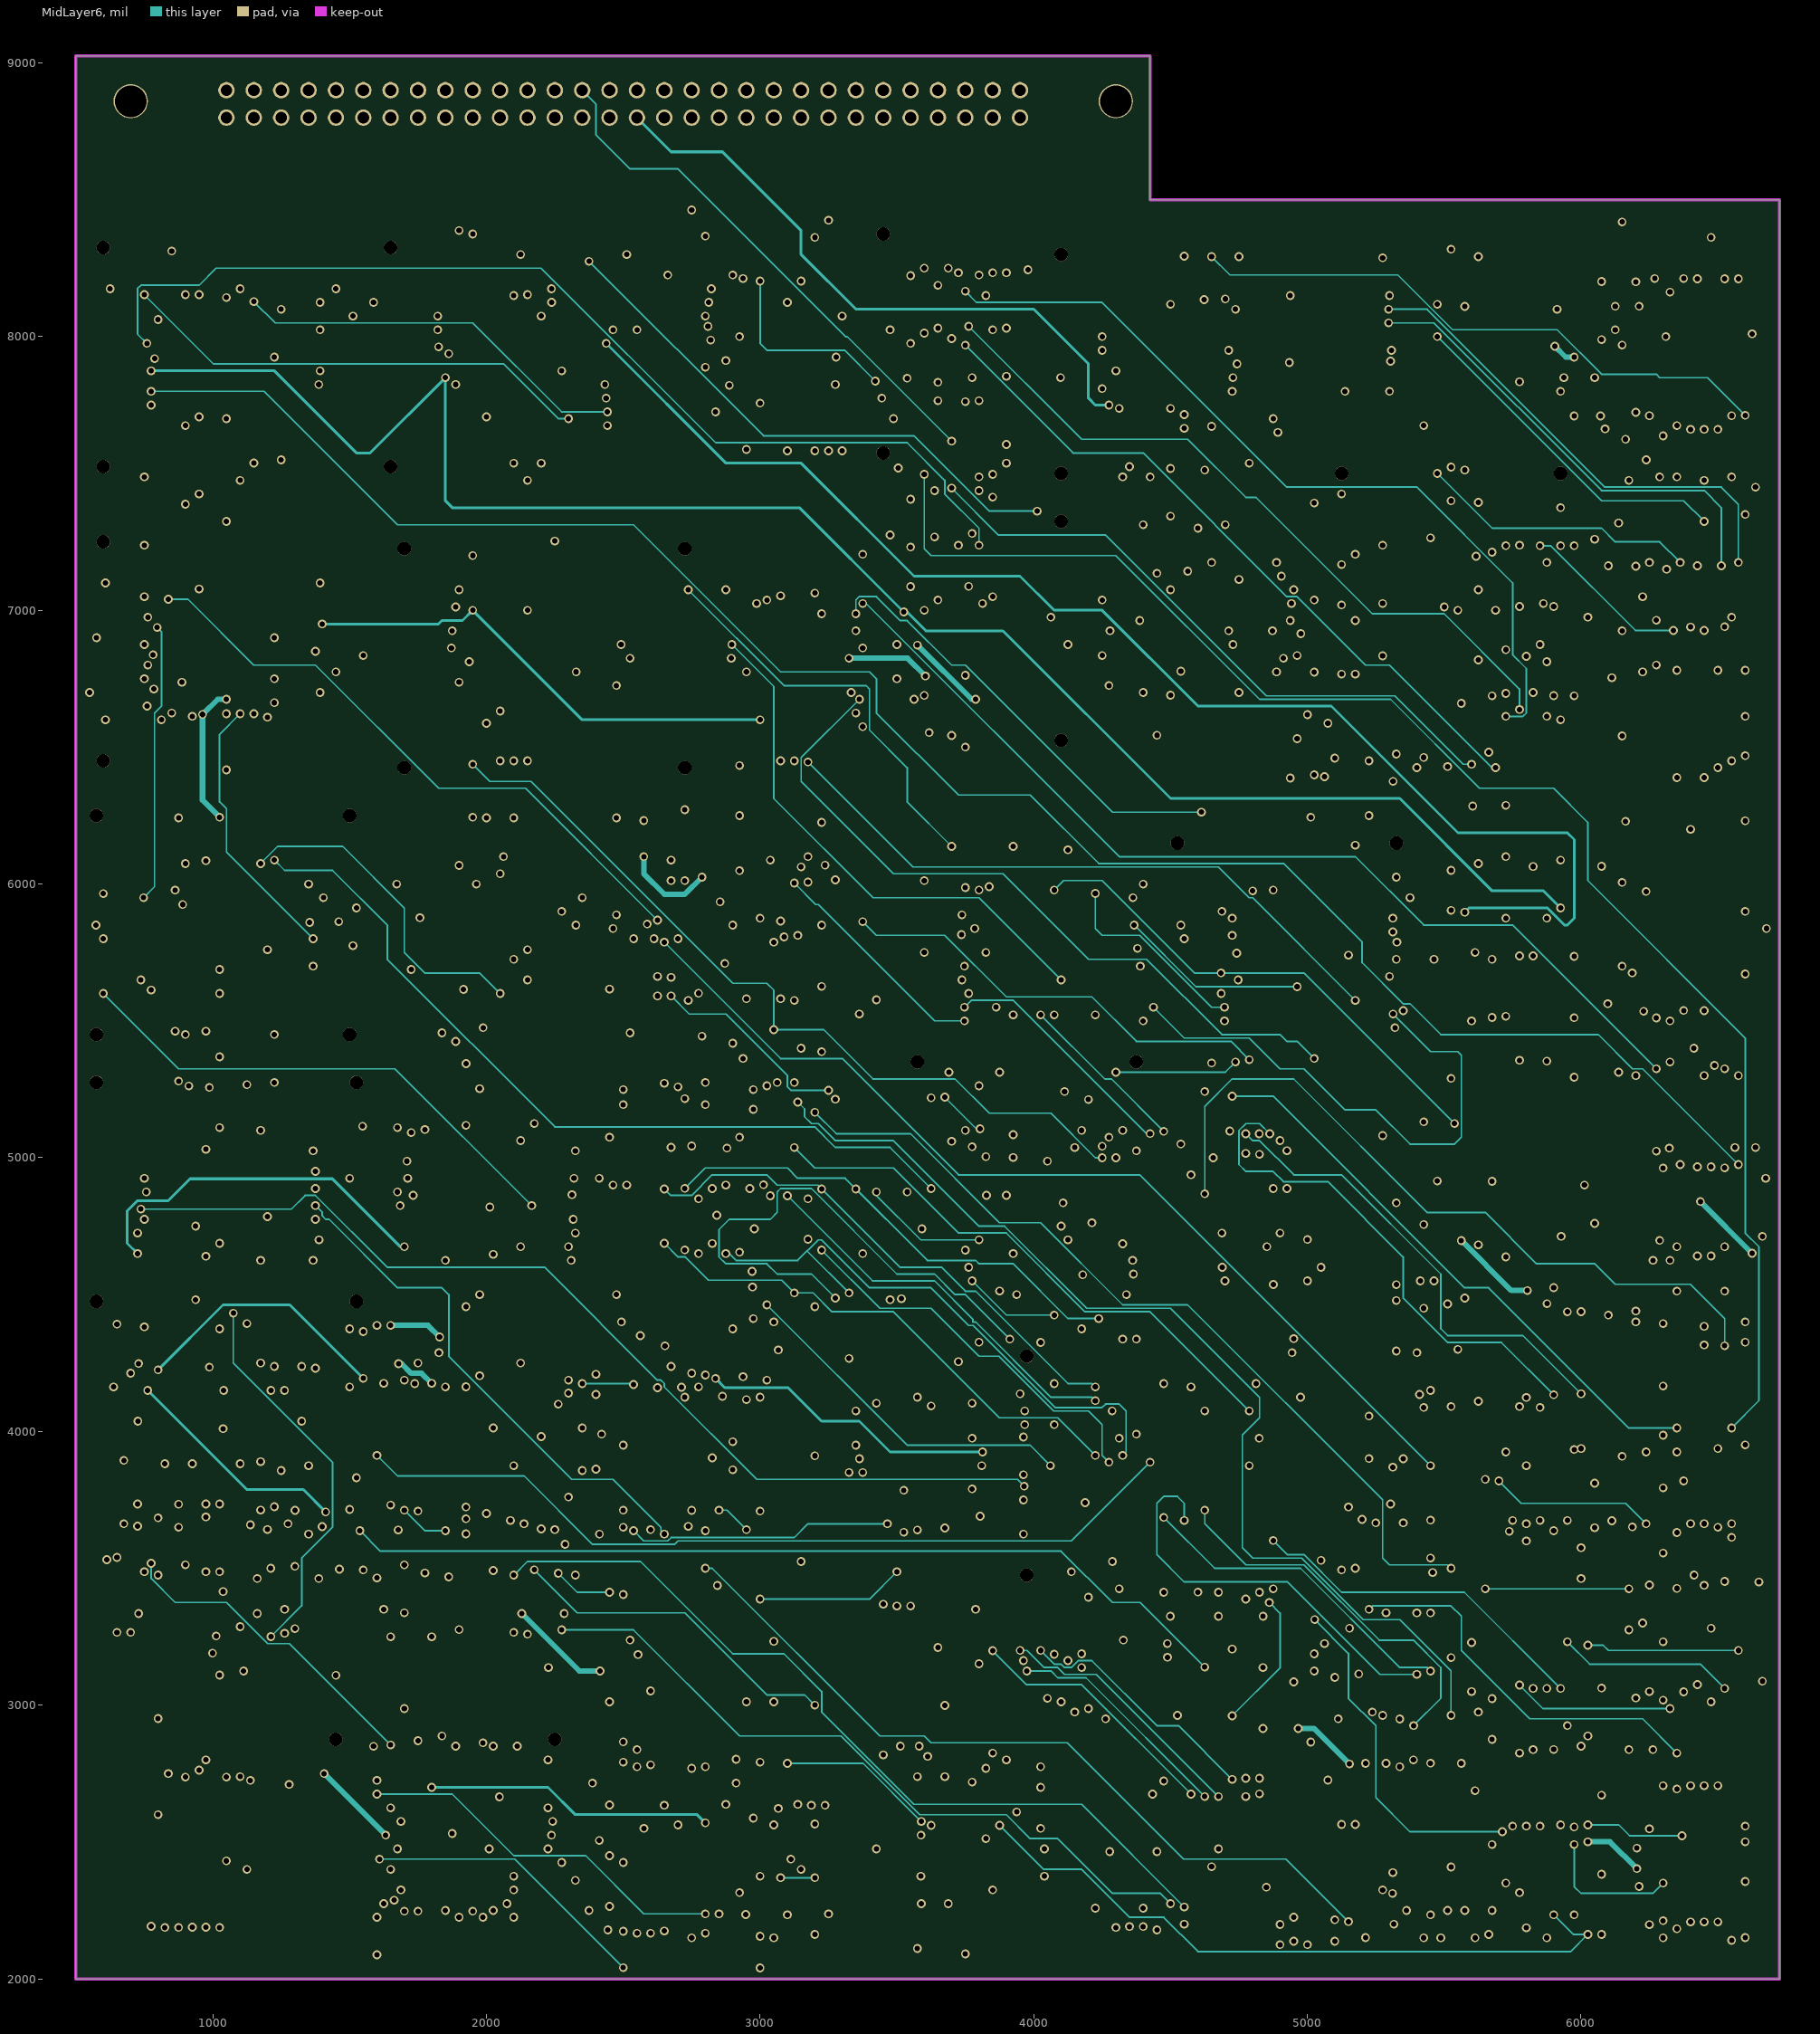
[diagram p7: MidLayer6]

## Layer stack, top to bottom
TopLayer: signal copper 1.4
Dielectric: core 12.6, FR-4, Dk 4.8
MidLayer1: signal copper 1.4
Dielectric: prepreg 12.6, FR-4, Dk 4.8
MidLayer2: signal copper 1.4
Dielectric: core 12.6, FR-4, Dk 4.8
MidLayer3: signal copper 1.4
Dielectric: prepreg 12.6, FR-4, Dk 4.8
MidLayer4: signal copper 1.4
Dielectric: core 12.6, FR-4, Dk 4.8
MidLayer5: signal copper 1.4
Dielectric: prepreg 12.6, FR-4, Dk 4.8
MidLayer6: signal copper 1.4
Dielectric: core 12.6, FR-4, Dk 4.8
BottomLayer: signal copper 1.4

## Board outline
6725,2000 6725,8500 4425,8500 4425,9025 500,9025 500,2000 6725,2000

## Design rules (kind name [scope] priority, off if disabled: settings)
Clearance [All] p1: gap=6
FabricationTestPointUsage TestPointUsage [All] p1: valid=0 allowmultiple=FALSE
FabricationTestpoint Testpoint [All] p1: side=3 testpointundercomponent=TRUE minsize=40 maxsize=100 preferedsize=60 minholesize=20 maxholesize=40 preferedholesize=32 testpointgrid=1 allowsidetop=TRUE allowsidebottom=TRUE usegrid=TRUE gridtolerance=0.01
PlaneClearance [All] p1: clearance=10
PolygonConnect [All] p1: connectstyle=Relief reliefconductorwidth=10 reliefentries=4 polygonreliefangle="90 Angle"
RoutingTopology RoutingTopology_1 [InNet('VDD')] p1: topology=Horizontal
RoutingTopology [InNet('GND')] p2: topology=Horizontal
RoutingTopology RoutingTopology_2 [All] p3: topology=Shortest
RoutingVias [All] p1: holewidth=20 width=32 viastyle="Through Hole" minholewidth=20 minwidth=30 maxholewidth=28 maxwidth=50
SilkscreenOverComponentPads [All] p1: minsilkscreentomaskgap=10
SolderMaskExpansion [All] p1: expansion=2
Width Width_10 [InNet('BITCLK')] p1: maxlimit=10 minlimit=10 preferedwidth=10
Width Width_11 [InNet('20MHZ1')] p2: maxlimit=10 minlimit=10 preferedwidth=10
Width Width_8 [InNet('N22')] p3: maxlimit=10 minlimit=10 preferedwidth=10
Width Width_9 [InNet('BITCLK1')] p4: maxlimit=10 minlimit=10 preferedwidth=10
Width Width_14 [InNet('VDD')] p5: maxlimit=20 minlimit=20 preferedwidth=20
Width Width_15 [InNet('GND')] p6: maxlimit=20 minlimit=20 preferedwidth=20
Width Width_12 [InNet('SYMCLK2')] p7: maxlimit=20 minlimit=20 preferedwidth=20
Width Width_13 [InNet('5MHZ')] p8: maxlimit=20 minlimit=20 preferedwidth=20
Width Width_2 [InNet('SYMCLK1')] p9: maxlimit=10 minlimit=10 preferedwidth=10
Width Width_3 [InNet('SYMCLK')] p10: maxlimit=10 minlimit=10 preferedwidth=10
Width [InNet('VDD1')] p11: maxlimit=10 minlimit=10 preferedwidth=10
Width Width_1 [InNet('GND1')] p12: maxlimit=10 minlimit=10 preferedwidth=10
Width Width_6 [InNet('SYMCLKN')] p13: maxlimit=10 minlimit=10 preferedwidth=10
Width Width_7 [InNet('SYMCLKM')] p14: maxlimit=10 minlimit=10 preferedwidth=10
Width Width_4 [InNet('SCLK')] p15: maxlimit=10 minlimit=10 preferedwidth=10
Width Width_5 [InNet('N4')] p16: maxlimit=10 minlimit=10 preferedwidth=10
Width Width_16 [All] p17: maxlimit=6 minlimit=6 preferedwidth=6
23 further rules are at their usual default settings.

## Components (designator, comment, footprint, x,y, rotation, side; value= is the part's Value field where it differs from the comment)
C18 "C0805" 0805 2775,5900 r270 bottom
C27 "C0805" 0805 2050,3375 r270 bottom
C28 "C0805" 0805 3000,4275 r270 bottom
C29 "C0805" 0805 3400,4425 r270 bottom
C38 "C0805" 0805 5025,6875 r270 bottom
C39 "C0805" 0805 4625,5800 r270 bottom
C45 "C0805" 0805 675,3775 r270 bottom
C46 "C0805" 0805 5525,7275 r270 bottom
C48 "C0805" 0805 4625,5125 r270 bottom
C50 "C0805" 0805 4925,2375 r270 bottom
C51 "C0805" 0805 5225,4175 r270 bottom
C53 "C0805" 0805 5725,4050 r270 bottom
C55 "C0805" 0805 3625,5100 r270 bottom
C57 "C0805" 0805 4200,3275 r270 bottom
C59 "C0805" 0805 3725,3750 r90 bottom
C60 "C0805" 0805 4500,7625 r270 bottom
C61 "C0805" 0805 6125,2400 r90 bottom
C67 "C0805" 0805 1925,4600 r270 bottom
C70 "C0805" 0805 5225,5700 r90 bottom
C73 "C0805" 0805 6150,5575 r270 bottom
C79 "C0805" 0805 2225,2300 r90 bottom
C80 "C0805" 0805 1100,3775 r270 bottom
C83 "C0805" 0805 5625,6700 r270 bottom
C85 "C0805" 0805 6350,4800 r270 bottom
C88 "C0805" 0805 4900,2875 r90 bottom
C90 "C0805" 0805 5675,3675 r270 bottom
C104 "C0805" 0805 6150,8300 r270 bottom
C106 "C0805" 0805 5225,3775 r270 bottom
C112 "C0805" 0805 5525,5775 r270 bottom
C119 "C0805" 0805 1850,5575 r90 bottom
C123 "C0805" 0805 3900,8125 r90 bottom
C124 "C0805" 0805 3900,7750 r90 bottom
C126 "C0805" 0805 1925,5225 r270 bottom
C127 "C0805" 0805 4450,6650 r90 bottom
C128 "C0805" 0805 1025,6125 r270 bottom
C130 "C0805" 0805 3550,6775 r270 bottom
C134 "C0805" 0805 2475,3225 r270 bottom
C140 "C0805" 0805 1100,4275 r270 bottom
C141 "C0805" 0805 1600,3775 r270 bottom
C143 "C0805" 0805 5075,2825 r270 bottom
C161 "C0805" 0805 4500,7225 r90 bottom
C163 "C0805" 0805 650,4275 r270 bottom
C164 "C0805" 0805 2500,2275 r270 bottom
C165 "C0805" 0805 2500,4275 r270 bottom
C166 "C0805" 0805 5100,3375 r270 bottom
C167 "C0805" 0805 2800,5075 r270 bottom
C168 "C0805" 0805 925,4600 r90 bottom
C170 "C0805" 0805 5225,7950 r270 bottom
C173 "C0805" 0805 6150,7200 r270 bottom
C180 "C0805" 0805 5825,7875 r90 bottom
C181 "C0805" 0805 5975,4800 r270 bottom
C186 "C0805" 0805 6300,3675 r270 bottom
C189 "C0805" 0805 1550,3375 r90 bottom
C191 "C0805" 0805 2500,2675 r270 bottom
C192 "C0805" 0805 4100,5125 r270 bottom
C193 "C0805" 0805 2950,5700 r270 bottom
C195 "6032JK" 6032JK 4825,8000 r270 bottom
C196 "C0805" 0805 5375,2375 r270 bottom
C197 "C0805" 0805 3825,2650 r270 bottom
C198 "C0805" 0805 3675,5775 r270 bottom
C202 "C0805" 0805 1050,2650 r270 bottom
C205 "C0805" 0805 2900,4475 r270 bottom
C212 "C0805" 0805 5725,4500 r90 bottom
C213 "C0805" 0805 6300,3125 r270 bottom
C214 "C0805" 0805 5675,3125 r270 bottom
C216 "C0805" 0805 2100,3775 r270 bottom
C223 "C0805" 0805 5525,6325 r270 bottom
C225 "C0805" 0805 6150,6100 r270 bottom
C232 "C0805" 0805 1025,5500 r90 bottom
C241 "C0805" 0805 2200,4100 r270 bottom
C242 "C0805" 0805 4300,5725 r90 bottom
C244 "C0805" 0805 650,3375 r270 bottom
C249 "C0805" 0805 1950,6125 r270 bottom
C250 "C0805" 0805 4075,4275 r270 bottom
C253 "C0805" 0805 1600,4275 r270 bottom
C254 "C0805" 0805 6150,7750 r270 bottom
C258 "C0805" 0805 6600,6350 r90 bottom
C261 "C0805" 0805 975,5150 r90 bottom
C262 "C0805" 0805 3550,7525 r90 bottom
C264 "C0805" 0805 5825,2275 r270 bottom
C266 "C0805" 0805 5025,7250 r270 bottom
C267 "6032JK" 6032JK 1125,5750 r90 bottom
C274 "C0805" 0805 4550,8175 r270 bottom
C280 "C0805" 0805 5025,6500 r270 bottom
C282 "C0805" 0805 3225,5975 r270 bottom
C287 "C0805" 0805 3000,2275 r270 bottom
C288 "C0805" 0805 1100,3375 r90 bottom
C291 "C0805" 0805 3000,2675 r270 bottom
C299 "C0805" 0805 6300,4500 r90 bottom
J4 "CONN\60P" CONN\60P 1050,8800 r0 top
R1 "R0805" 0805 1100,3550 r90 bottom
R3 "R0805" 0805 775,3775 r270 bottom
R5 "R0805" 0805 650,4050 r90 bottom
R6 "R0805" 0805 2725,6125 r90 bottom
R7 "R0805" 0805 2575,5975 r270 bottom
R9 "R0805" 0805 1275,4825 r270 bottom
R10 "R0805" 0805 975,2650 r90 bottom
R11 "R0805" 0805 2225,4825 r270 bottom
R12 "R0805" 0805 1600,5075 r90 bottom
R15 "R0805" 0805 6300,4275 r270 bottom
R16 "R0805" 0805 6375,4275 r270 bottom
R17 "R0805" 0805 5425,5250 r270 bottom
R20 "R0805" 0805 5725,5775 r90 bottom
R22 "R0805" 0805 3125,3925 r90 bottom
R23 "R0805" 0805 2150,3150 r90 bottom
R24 "R0805" 0805 1687.5,5837.5 r90 bottom
R25 "R0805" 0805 675,5850 r270 bottom
R30 "R0805" 0805 3200,4575 r270 bottom
R31 "R0805" 0805 1875,2650 r90 bottom
R32 "R0805" 0805 1775,5775 r90 bottom
R33 "R0805" 0805 775,5850 r270 bottom
R34 "R0805" 0805 6450,5075 r90 bottom
R37 "R0805" 0805 5975,3825 r90 bottom
R43 "R0805" 0805 3750,5200 r270 bottom
R49 "R0805" 0805 3750,4825 r90 bottom
R58 "R0805" 0805 1100,4050 r90 bottom
R60 "R0805" 0805 3050,5700 r90 bottom
R62 "R0805" 0805 6150,6650 r270 bottom
R63 "R0805" 0805 5525,8150 r270 bottom
R64 "R0805" 0805 3700,6650 r270 bottom
R66 "R0805" 0805 4200,7850 r270 bottom
R67 "R0805" 0805 6475,8050 r90 bottom
R75 "R0805" 0805 1275,5800 r270 bottom
R76 "R0805" 0805 2200,5800 r270 bottom
R77 "R0805" 0805 4200,6875 r270 bottom
R85 "R0805" 0805 4675,3125 r270 bottom
R86 "R0805" 0805 4575,2450 r270 bottom
R87 "R0805" 0805 6300,2550 r270 bottom
R89 "R0805" 0805 5100,2325 r270 bottom
R91 "R0805" 0805 5325,4175 r270 bottom
R97 "R0805" 0805 3750,2200 r270 bottom
R109 "R0805" 0805 4875,4325 r270 bottom
R110 "R0805" 0805 4050,4875 r90 bottom
R112 "R0805" 0805 6600,6900 r90 bottom
R113 "R0805" 0805 4350,3700 r90 bottom
R115 "R0805" 0805 3400,3700 r270 bottom
R116 "R0805" 0805 3525,4750 r90 bottom
R121 "R0805" 0805 4375,2425 r270 bottom
R123 "R0805" 0805 4075,4575 r270 bottom
R126 "R0805" 0805 4500,3825 r90 bottom
R129 "R0805" 0805 2225,3375 r90 bottom
R212 "R0805" 0805 6600,5800 r270 bottom
R213 "R0805" 0805 5425,4875 r90 bottom
R279 "R0805" 0805 950,3150 r270 bottom
R281 "R0805" 0805 1450,3375 r90 bottom
R284 "R0805" 0805 2750,5325 r270 bottom
R285 "R0805" 0805 2900,4750 r90 bottom
R286 "R0805" 0805 1800,3600 r90 bottom
R287 "R0805" 0805 2500,4050 r90 bottom
R288 "R0805" 0805 1975,2625 r90 bottom
R289 "R0805" 0805 2500,2975 r270 bottom
R291 "R0805" 0805 1650,3150 r90 bottom
U1 "74ALS74" DIP14\SO 2625,6050 r180 top
U2 "MSSY-44S" CC44AMP 1000,6850 r0 top
U3 "74AS174" DIP16\SO 1225,3675 r0 top
U4 "MSYM-44S" CC44AMP 1000,7925 r0 top
U5 "74ALS74" DIP14\SO 800,4200 r0 top
U6 "SLT-44S" CC44AMP 975,4875 r0 top
U8 "74AS11" DIP14\SO 800,3300 r0 top
U9 "74ALS00" DIP14\SO 4775,5050 r0 top
U10 "TXMSG-44S" CC44AMP 2050,7925 r0 top
U11 "MSG-44S" CC44AMP 1925,4875 r0 top
U14 "74AS32" DIP14\SO 2875,4175 r0 top
U15 "74ALS08" DIP14\SO 2625,5625 r0 top
U16 "74ALS74" DIP14\SO 825,3700 r0 top
U17 "74ALS32" DIP14\SO 3700,7050 r0 top
U18 "74ALS74" DIP14\SO 1600,4200 r0 top
U19 "74ALS74" DIP14\SO 3075,5625 r0 top
U20 "BCGEN-P16V8-25" CC20 4950,4625 r0 top
U21 "74ALS74" DIP14\SO 6450,4350 r0 top
U22 "74ALS153" DIP16\SO 5975,4475 r0 top
U23 "74FCT574T" DIP20\SOL 5750,5625 r0 top
U24 "74ALS163" DIP16\SO 5975,4100 r0 top
U25 "74AS74" DIP14\SO 5300,3700 r0 top
U28 "74ALS175" DIP16\SO 1200,4200 r0 top
U31 "74FCT574T" DIP20\SOL 6375,7050 r0 top
U32 "PRM-44S" CC44AMP 5525,7900 r90 top
U33 "74AS08" DIP14\SO 5475,4500 r0 top
U35 "74ALS174" DIP16\SO 3725,8200 r180 top
U36 "74ALS174" DIP16\SO 3725,7800 r180 top
U37 "74FCT821T" DIP24\SOL 6325,7600 r0 top
U39 "74ALS08" DIP14\SO 3125,5225 r180 top
U40 "AGC-44S" CC44AMP 4500,7900 r0 top
U42 "74AS74" DIP14\SO 3700,6712.5 r0 top
U43 "74QCT244" DIP20\SOL 6400,5425 r0 top
U45 "74ALS174" DIP16\SO 5200,6800 r0 top
U46 "74ALS174" DIP16\SO 5200,7200 r0 top
U47 "74ALS174" DIP16\SO 5800,6650 r0 top
U48 "74ALS174" DIP16\SO 5200,6425 r0 top
U51 "74FCT821T" DIP24\SOL 6350,8100 r0 top
U57 "VAL-MACH210-20" CC44AMP 1900,5850 r0 top
U58 "TCTL_MACH210-20" CC44AMP 975,5850 r0 top
U59 "PCMP-MACH210-20" CC44AMP 4500,6925 r0 top
U73 "74ALS74" DIP14\SO 3775,5050 r0 top
U76 "74AS08" DIP14\SO 3150,2600 r0 top
U77 "74ALS74" DIP14\SO 5475,4125 r0 top
U78 "74ALS74" DIP14\SO 5050,2175 r0 top
U80 "74FCT245T" DIP20\SOL 6400,3550 r0 top
U81 "74AS32" DIP14\SO 5525,2200 r0 top
U82 "74FCT245T" DIP20\SOL 5875,3550 r0 top
U83 "74AS02" DIP14\SO 5975,2200 r0 top
U87 "74AS08" DIP14\SO 3075,6050 r180 top
U88 "74ALS169" DIP16\SO 5850,2525 r180 top
U89 "74FCT574T" DIP20\SOL 6400,2950 r0 top
U90 "AM7200-35A" CCR32 4675,3275 r90 top
U91 "74FCT574T" DIP20\SOL 5850,2950 r0 top
U92 "74ALS175" DIP16\SO 6450,5000 r0 top
U93 "74ALS169" DIP16\SO 6425,2175 r180 top
U94 "TXDMA-44S" CC44AMP 3050,7975 r180 top
U95 "DARB-P22V10-15" CC28 3725,2425 r180 top
U96 "74ALS169" DIP16\SO 6425,2525 r180 top
U113 "PEISR_MACH210-20" CC44AMP 4925,5750 r270 top
U114 "74AS174" DIP16\SO 4275,5050 r0 top
U115 "74FCT244T" DIP20\SOL 5750,7125 r0 top
U116 "PECMD-44S" CC44AMP 3975,5750 r90 top
U118 "74FCT573T" DIP20\SOL 6375,6500 r180 top
U120 "DMATO_PAL16V8-25" CC20 4425,4600 r270 top
U121 "74AS02" DIP14\SO 2075,3675 r0 top
U122 "PADD-44S" CC44AMP 3575,3875 r180 top
U123 "82S123" CC20 3850,4600 r0 top
U125 "74ALS521A" DIP20\SOL 3250,4775 r180 top
U126 "74ALS74" DIP14\SO 2200,3300 r0 top
U128 "RXDMA-44S" CC44AMP 3125,6825 r0 top
U129 "74ALS161" DIP16\SO 4650,2700 r180 top
U130 "74FCT574T" DIP20\SOL 4025,3075 r180 top
U132 "74ALS74" DIP14\SO 3150,2200 r0 top
U133 "74ALS161" DIP16\SO 6450,4675 r180 top
U134 "74FCT574T" DIP20\SOL 3425,3100 r180 top
U135 "74QCT244" DIP20\SOL 5750,6175 r0 top
U136 "74FCT574T" DIP20\SOL 5300,2675 r0 top
U137 "74FCT574T" DIP20\SOL 5300,3225 r0 top
U138 "AM7200-35A" CCR32 4425,4025 r270 top
U139 "74ALS161" DIP16\SO 4375,2225 r180 top
U193 "74ALS666" DIP24\SOL 5700,5025 r180 top
U200 "74FCT541T" DIP20\SOL 6375,5950 r0 top
U218 "74AS32" DIP14\SO 6450,3975 r180 top
U241 "74ALS04" DIP14\SO 2025,4200 r0 top
U242 "74ALS32" DIP14\SO 3700,7450 r0 top
U245 "74FCT540T" DIP20\SOL 1000,2300 r180 top
U246 "74FCT540T" DIP20\SOL 1025,2850 r180 top
U257 "74ALS74" DIP14\SO 2450,4175 r0 top
U258 "74ALS374" DIP20\SOL 2700,4775 r180 top
U259 "CRC-44S" CC44AMP 2100,6825 r0 top
U260 "FIF-44S" CC44AMP 1850,2475 r270 top
U261 "74FCT821T" DIP24\SOL 2775,3125 r0 top
U262 "74AS157" DIP16\SO 2675,2200 r0 top
U263 "74ALS74" DIP14\SO 1650,3675 r0 top
U264 "74F194" DIP16\SO 1275,3300 r0 top
U265 "74F166" DIP16\SO 2675,2600 r0 top
U266 "74ALS164" DIP14\SO 2650,5225 r180 top
U268 "74AS153" DIP16\SO 1725,3300 r180 top
U303 "74AS74" DIP14\SO 2900,3675 r0 top
U304 "74AS74" DIP14\SO 2500,3675 r0 top

## Footprints (in the part's own frame and the unit in brackets; to place one, negate y for a bottom-side part, rotate by r counter-clockwise, add the part's x,y. Pads: shape width x height; smd on the part's side, far side on the other; paste and mask are expansions set on the pad)
0805 [mil]
  rect 50x50 smd: 1(-40,0) 2(40,0)
  silkscreen extent -75,-35 75,35
6032JK [mil]
  rect 110x110 smd: 1(-106,0) 2(107,0)
  silkscreen extent -175,-70 175,70
CC20 [mil]
  rect 24x90 smd: 1(0,-175) 2(50,-175) 3(100,-175) 9(100,175) 10(50,175) 11(0,175) 12(-50,175) 13(-100,175) 19(-100,-175) 20(-50,-175)
  rect 90x24 smd: 4(175,-100) 5(175,-50) 6(175,0) 7(175,50) 8(175,100) 14(-175,100) 15(-175,50) 16(-175,0) 17(-175,-50) 18(-175,-100)
  silkscreen extent -125,-125 125,125
CC28 [mil]
  rect 24x90 smd: 1(0,-225) 2(50,-225) 3(100,-225) 4(150,-225) 12(150,225) 13(100,225) 14(50,225) 15(0,225) 16(-50,225) 17(-100,225) 18(-150,225) 26(-150,-225) 27(-100,-225) 28(-50,-225)
  rect 90x24 smd: 5(225,-150) 6(225,-100) 7(225,-50) 8(225,0) 9(225,50) 10(225,100) 11(225,150) 19(-225,150) 20(-225,100) 21(-225,50) 22(-225,0) 23(-225,-50) 24(-225,-100) 25(-225,-150)
  silkscreen extent -175,-175 175,175
CC44AMP [mil]
  rect 30x75 smd: 1(0,-310) 2(50,-310) 3(100,-310) 4(150,-310) 5(200,-310) 6(250,-310) 18(250,310) 19(200,310) 20(150,310) 21(100,310) 22(50,310) 23(0,310) 24(-50,310) 25(-100,310) 26(-150,310) 27(-200,310) 28(-250,310) 40(-250,-310) 41(-200,-310) 42(-150,-310) 43(-100,-310) 44(-50,-310)
  rect 75x30 smd: 7(310,-250) 8(310,-200) 9(310,-150) 10(310,-100) 11(310,-50) 12(310,0) 13(310,50) 14(310,100) 15(310,150) 16(310,200) 17(310,250) 29(-310,250) 30(-310,200) 31(-310,150) 32(-310,100) 33(-310,50) 34(-310,0) 35(-310,-50) 36(-310,-100) 37(-310,-150) 38(-310,-200) 39(-310,-250)
  round 50 hole 50: 45(-400,-400) 46(-400,400)
  silkscreen extent -435,-435 435,435
CCR32 [mil]
  rect 24x90 smd: 1(0,-275) 2(50,-275) 3(100,-275) 4(150,-275) 14(150,275) 15(100,275) 16(50,275) 17(0,275) 18(-50,275) 19(-100,275) 20(-150,275) 30(-150,-275) 31(-100,-275) 32(-50,-275)
  rect 90x24 smd: 5(225,-200) 6(225,-150) 7(225,-100) 8(225,-50) 9(225,0) 10(225,50) 11(225,100) 12(225,150) 13(225,200) 21(-225,200) 22(-225,150) 23(-225,100) 24(-225,50) 25(-225,0) 26(-225,-50) 27(-225,-100) 28(-225,-150) 29(-225,-200)
  silkscreen extent -175,-225 175,225
CONN\60P [mil]
  rect 60x60 / inner round 60 / far side rect 60x60 hole 42: 1(0,0)
  round 60 hole 42: 2(0,100) 3(100,0) 4(100,100) 5(200,0) 6(200,100) 7(300,0) 8(300,100) 9(400,0) 10(400,100) 11(500,0) 12(500,100) 13(600,0) 14(600,100) 15(700,0) 16(700,100) 17(800,0) 18(800,100) 19(900,0) 20(900,100) 21(1000,0) 22(1000,100) 23(1100,0) 24(1100,100) 25(1200,0) 26(1200,100) 27(1300,0) 28(1300,100) 29(1400,0) 30(1400,100) 31(1500,0) 32(1500,100) 33(1600,0) 34(1600,100) 35(1700,0) 36(1700,100) 37(1800,0) 38(1800,100) 39(1900,0) 40(1900,100) 41(2000,0) 42(2000,100) 43(2100,0) 44(2100,100) 45(2200,0) 46(2200,100) 47(2300,0) 48(2300,100) 49(2400,0) 50(2400,100) 51(2500,0) 52(2500,100) 53(2600,0) 54(2600,100) 55(2700,0) 56(2700,100) 57(2800,0) 58(2800,100) 59(2900,0) 60(2900,100)
  round 125 hole 116: 61(-350,60) 62(3250,60)
  silkscreen extent -450,-125 3350,225
DIP14\SO [mil]
  rect 24x60 smd: 1(-150,-108) 2(-100,-108) 3(-50,-108) 4(0,-108) 5(50,-108) 6(100,-108) 7(150,-108) 8(150,108) 9(100,108) 10(50,108) 11(0,108) 12(-50,108) 13(-100,108) 14(-150,108)
  silkscreen extent -175,-78 175,77
DIP16\SO [mil]
  rect 24x60 smd: 1(-175,-107) 2(-125,-107) 3(-75,-107) 4(-25,-107) 5(25,-107) 6(75,-107) 7(125,-107) 8(175,-107) 9(175,108) 10(125,108) 11(75,108) 12(25,108) 13(-25,108) 14(-75,108) 15(-125,108) 16(-175,108)
  silkscreen extent -200,-77 200,78
DIP20\SOL [mil]
  rect 24x70 smd: 1(-225,-190) 2(-175,-190) 3(-125,-190) 4(-75,-190) 5(-25,-190) 6(25,-190) 7(75,-190) 8(125,-190) 9(175,-190) 10(225,-190) 11(225,190) 12(175,190) 13(125,190) 14(75,190) 15(25,190) 16(-25,190) 17(-75,190) 18(-125,190) 19(-175,190) 20(-225,190)
  silkscreen extent -250,-155 250,155
DIP24\SOL [mil]
  rect 24x70 smd: 1(-275,-190) 2(-225,-190) 3(-175,-190) 4(-125,-190) 5(-75,-190) 6(-25,-190) 7(25,-190) 8(75,-190) 9(125,-190) 10(175,-190) 11(225,-190) 12(275,-190) 13(275,190) 14(225,190) 15(175,190) 16(125,190) 17(75,190) 18(25,190) 19(-25,190) 20(-75,190) 21(-125,190) 22(-175,190) 23(-225,190) 24(-275,190)
  silkscreen extent -300,-155 300,155

## Via types
v1: diameter 32, hole 20, TopLayer to BottomLayer, 2014 vias

## Nets (pads, with @x,y where several pads share a name; then routed paths per layer and width w, separated by ;. In a path a pad name is that pad's centre, name@x,y a point inside that pad or via, vN(x,y) a via of type N, cw(c..) or ccw(c..) an arc to the next point about the centre after c; other vN are vias at no path point)
5MHZ: U14.10 U17.6 U32.13 U36.9 U40.35 U42.3 | length 7230.3
  TopLayer w20: U14.10@2925,4283 2925,4212.5 v1(2937.5,4200) ; v1(5475,8118) U32.13@5475,8210 ; U36.9@3550,7700 v1(3487.5,7700) U36.9@3550,7700 ; U36.9@3550,7700 U36.9@3550,7692 U36.9@3550,7700 ; 3650,6639 U42.3@3650,6604.5 3650,6639 ; 3650,6639 v1(3600,6689) 3650,6639 ; 3800,7012 U17.6@3800,6942 3800,7012 ; 3800,7012 v1(3813,7025) 3800,7012 ; v1(4098,7850) U40.35@4190,7850 v1(4098,7850)
  MidLayer2 w20: v1(3487.5,7700) 3587.5,7800 4048,7800 v1(4098,7850) 4160.5,7912.5 4337.5,7912.5 4450,8025 5025,8025 5212.5,8212.5 5380.5,8212.5 v1(5475,8118)
  MidLayer3 w20: v1(2937.5,4200) 2937.5,4457 2975,4494.5 3025,4494.5 3050,4519.5 3050,4650 3412.5,5012.5 3412.5,5520 3387.5,5545 3387.5,5587.5 3412.5,5612.5 3412.5,6450 3600,6637.5 v1(3600,6689) ; v1(3487.5,7700) 3562.5,7625 3562.5,7450 3675,7337.5 3675,7075 3725,7025 v1(3813,7025)
  BottomLayer w20: v1(3600,6689) 3637.5,6726.5 3637.5,6849.5 v1(3813,7025)
  other v1: 3600,6689 3813,7025 3487.5,7700 4098,7850
8MHZ: R24.2 R32.2 U23.14 U57.35 | length 5618.7
  TopLayer w6: v1(1512.5,5775) 1537.5,5800 U57.35@1590,5800 ; v1(5825,5737.5) U23.14@5825,5815
  MidLayer2 w6: v1(1512.5,5775) 1537.5,5800 2175,5800 2225,5750 2925,5750 3050,5875 3050,5900 3062.5,5912.5 4112.5,5912.5 4237.5,6037.5 5050,6037.5 5112.5,5975 5587.5,5975 v1(5825,5737.5)
  MidLayer5 w6: 1650,5775 v1(1512.5,5775) 1650,5775 ; 1650,5775 1700,5825 ; 1650,5775 1700,5825 ; 1700,5825 1705,5825 ; 1700,5825 1705,5825 ; 1705,5825 v1(1757,5877) 1705,5825
  BottomLayer w6: v1@1756.5,5877.5 R24.2@1687.5,5877.5 v1@1756.5,5877.5 ; v1@1756.5,5877.5 1775,5859 ; v1@1756.5,5877.5 v1(1757,5877) 1775,5859 ; 1775,5859 R32.2@1775,5815 1775,5859
  other v1: 1512.5,5775 1757,5877
20MHZ: U95.2 U113.35 U114.9 U116.35 U120.1 U132.3 U132.11 | length 6877.4
  TopLayer w6: U132.3@3100,2092 3100,2175 3150,2225 U132.11@3150,2308 ; U95.2@3675,2650 v1(3675,2739) ; U116.35@4025,5440 v1(4025,5522) ; v1(4875,5978) U113.35@4875,6060 ; U132.11@3150,2308 v1(3150,2400) U132.11@3150,2308 ; 4339,4600 v1(4364,4575) 4339,4600 ; 4339,4600 U120.1@4250,4600 4339,4600 ; 4450,5121.5 v1(4475,5096.5) ; 4450,5121.5 U114.9@4450,5158 ; 4450,5121.5 v1(4475,5096.5) ; 4450,5121.5 U114.9@4450,5158 ; 4450,5121.5 v1(4475,5096.5) ; 4450,5121.5 U114.9@4450,5158
  MidLayer1 w6: v1(4364,4575) 4475,4686 v1(4475,5096.5)
  MidLayer5 w6: v1(3150,2400) 3312.5,2562.5 3498.5,2562.5 v1(3675,2739)
  MidLayer6 w6: v1(4025,5522) 4259.5,5287.5 4284,5287.5 v1(4475,5096.5)
  BottomLayer w6: v1(3150,2400) 3475,2725 3475,3062.5 3587.5,3175 3587.5,3337.5 3825,3575 3912.5,3575 3937.5,3600 3937.5,3650 4175,3887.5 4175,4000 4300,4125 4300,4511 v1(4364,4575) ; v1(4475,5096.5) 4497.5,5119 4675,5119 4875,5319 v1(4875,5978)
  other v1: 3150,2400 4364,4575 4475,5096.5 4475,5096.5
20MHZ1: U78.3 U81.2 U88.2 U93.2 U94.13 U96.2 U128.13 | length 10242.4
  TopLayer w10: U94.13@2740,7925 2862.5,7925 v1(2875,7912.5) ; v1(3375,6862.5) 3387.5,6875 U128.13@3435,6875 v1(3500,6875) ; v1(5000,2125) U78.3@5000,2067 5000,2027.5 5002.5,2025 5400,2025 5425,2050 U81.2@5425,2092 v1(5425,2150) ; U93.2@6550,2282 6550,2325 6525,2350 6525,2575 ; v1(5975,2555) U88.2@5975,2632 v1(5975,2555) ; v1(5975,2555) 6000.5,2529.5 6158,2529.5 6175,2512.5 6300,2512.5 6362.5,2575 6525,2575 ; 6525,2575 6550,2600 ; 6525,2575 6550,2600 ; 6550,2600 U96.2@6550,2632 6550,2600
  MidLayer1 w10: v1(3500,6875) 3462.5,6837.5 3462.5,6387.5 3587.5,6262.5 3825,6262.5 3875,6212.5 3875,5612.5 4362.5,5125 4362.5,5087.5 4337.5,5062.5 4337.5,4925 4287.5,4875 4287.5,4575 4325,4537.5 4400,4537.5 4512.5,4425 4512.5,3637.5 4387.5,3512.5 4387.5,2375 4425,2337.5 4650,2337.5 4750,2237.5 4750,2087.5 4962.5,2087.5 v1(5000,2125)
  MidLayer4 w10: v1(2875,7912.5) 2915,7872.5 2915,7790 2900,7775 2900,7427.5 3262.5,7065 3262.5,6948 3348,6862.5 v1(3375,6862.5)
  MidLayer5 w10: v1(5425,2150) 5475,2200 5527,2200 5539.5,2212.5 5539.5,2327 5625,2412.5 5832.5,2412.5 v1(5975,2555)
$4N5: R213.2 U193.14 | length 130
  TopLayer w6: U193.14@5475,4835 v1(5475,4915)
  BottomLayer w6: R213.2@5425,4915 v1(5475,4915)
$4N6: U193.2 U193.23 | length 380
  TopLayer w6: U193.23@5925,4835 U193.2@5925,5215
$4N15: R212.2 U200.3 U200.4 U200.5 U200.6 U200.7 U200.8 U200.9 | length 1083.6
  TopLayer w6: U200.3@6250,5760 6250,5797.5 6252.5,5800 6297.5,5800 ; v1(6677.5,5837.5) 6585,5837.5 6547.5,5800 ; 6297.5,5800 6300,5797.5 ; 6297.5,5800 6347.5,5800 ; 6297.5,5800 6300,5797.5 ; 6300,5797.5 U200.4@6300,5760 6300,5797.5 ; 6347.5,5800 6350,5797.5 ; 6347.5,5800 6397.5,5800 ; 6347.5,5800 6350,5797.5 ; 6350,5797.5 U200.5@6350,5760 6350,5797.5 ; 6397.5,5800 6400,5797.5 ; 6397.5,5800 6447.5,5800 ; 6397.5,5800 6400,5797.5 ; 6400,5797.5 U200.6@6400,5760 6400,5797.5 ; 6447.5,5800 6450,5797.5 ; 6447.5,5800 6497.5,5800 ; 6447.5,5800 6450,5797.5 ; 6450,5797.5 U200.7@6450,5760 6450,5797.5 ; 6497.5,5800 6500,5797.5 ; 6497.5,5800 6547.5,5800 ; 6497.5,5800 6500,5797.5 ; 6500,5797.5 U200.8@6500,5760 6500,5797.5 ; 6547.5,5800 6550,5797.5 ; 6547.5,5800 6550,5797.5 ; 6550,5797.5 U200.9@6550,5760 6550,5797.5
  BottomLayer w6: R212.2@6600,5760 v1(6677.5,5837.5)
$4N155: U193.1 U200.1 U200.19 | length 1018.2
  TopLayer w6: U193.1@5975,5215 v1(5975,5294) ; v1(6150,5700) U200.1@6150,5760 6150,5925 6200,5975 U200.19@6200,6140
  BottomLayer w6: v1(5975,5294) 6037.5,5356.5 6037.5,5587.5 v1(6150,5700)
$7N690: U9.12 U218.6 | length 2264.7
  TopLayer w6: U9.12@4725,5158 v1(4725,5225) ; v1(6350,4012.5) U218.6@6350,4083
  MidLayer6 w6: v1(4725,5225) 4875,5225 5575,4525 5662.5,4525 6175,4012.5 v1(6350,4012.5)
$7N842: U218.4 U218.10 | length 236.7
  TopLayer w6: U218.10@6400,3867 6400,3950 6450,4000 U218.4@6450,4083
$9N686: U262.3 U265.13 | length 635.7
  TopLayer w6: U262.3@2600,2093 v1(2600,2167) ; v1(2650,2634) U265.13@2650,2708
  MidLayer1 w6: v1(2600,2167) 2650,2217 v1(2650,2634)
$9N693: U257.5 U259.10 | length 3060.6
  TopLayer w6: U259.10@2410,6725 v1(2475,6725) ; v1(2500,3950) U257.5@2500,4067
  MidLayer1 w6: v1(2475,6725) 2475,6525 2550,6450 2550,5856.5 2512.5,5819 2512.5,5775 2537.5,5750 2537.5,5520 2500,5482.5 2500,5418 2537.5,5380.5 2537.5,4225 2512.5,4200 2512.5,3962.5 v1(2500,3950)
$9N802: R284.2 U266.2 U266.9 | length 838.5
  TopLayer w6: U266.9@2550,5117 2550,5187.5 2575,5212.5 2575,5372.5 2577.5,5375 2622.5,5375 2625,5372.5 2625,5253.5 2662.5,5216 v1(2725,5216) 2750,5241 U266.2@2750,5333
  BottomLayer w6: 2750,5241 R284.2@2750,5285 2750,5241 ; 2750,5241 v1(2725,5216) 2750,5241
  other v1: 2725,5216
$9N1110: U257.2 U260.24 | length 1707.5
  TopLayer w6: U260.24@2160,2525 v1(2237.5,2525) ; v1(2350,4012.5) U257.2@2350,4067
  MidLayer1 w6: v1(2237.5,2525) 2300,2587.5 2300,3209 2250,3259 2250,3387.5 2287.5,3425 2287.5,3512.5 2325,3550 2325,3987.5 v1(2350,4012.5)
$9N1173: U257.12 U260.29 | length 1622.3
  TopLayer w6: U260.29@2100,2785 2100,2837.5 v1(2112.5,2850) ; v1(2400,4209) U257.12@2400,4283
  MidLayer3 w6: v1(2112.5,2850) 2375,3112.5 2375,4184 v1(2400,4209)
$9N1174: U258.3 U266.3 | length 574.8
  TopLayer w6: v1(2700,5259) U266.3@2700,5333 ; v1(2825,4887.5) U258.3@2825,4965
  MidLayer4 w6: v1(2700,5259) 2700,5087.5 2725,5062.5 2725,4987.5 v1(2825,4887.5)
$9N1176: U258.4 U266.4 | length 649.8
  TopLayer w6: v1(2650,5272) U266.4@2650,5333 ; v1(2775,4850) U258.4@2775,4965
  MidLayer4 w6: v1(2650,5272) 2687.5,5234.5 2687.5,5062.5 2712.5,5037.5 2712.5,4950 2775,4887.5 v1(2775,4850)
$9N1178: U258.7 U266.5 | length 378.4
  TopLayer w6: U266.5@2600,5333 2600,5237.5 2625,5212.5 U258.7@2625,4965
$9N1180: U258.8 U266.6 | length 399.1
  TopLayer w6: U266.6@2550,5333 2550,5237.5 2525,5212.5 2525,5062.5 2575,5012.5 U258.8@2575,4965
$9N1182: U258.13 U266.10 | length 542.4
  TopLayer w6: U258.13@2575,4585 2575,4762.5 2600,4787.5 U266.10@2600,5117
$9N1184: U258.14 U266.11 | length 542.4
  TopLayer w6: U258.14@2625,4585 2625,4900 2650,4925 U266.11@2650,5117
$9N1186: U258.17 U266.12 | length 583.8
  TopLayer w6: v1(2675,5038) 2700,5063 U266.12@2700,5117 ; U258.17@2775,4585 v1(2775,4650)
  MidLayer4 w6: v1(2675,5038) 2700,5013 2700,4750 2775,4675 v1(2775,4650)
$9N1207: U121.4 U257.3 U257.11 | length 1177.5
  TopLayer w6: U121.4@2075,3567 2075,3624.5 2113,3662.5 v1(2137.5,3662.5) ; U257.11@2450,4283 2450,4185 v1(2400,4135) ; v1(2400,4135) U257.3@2400,4067 v1(2400,4135)
  BottomLayer w6: v1(2137.5,3662.5) 2100,3700 2065,3700 2062.5,3702.5 2062.5,3762.5 2075,3775 2200,3775 2387.5,3962.5 2387.5,4122.5 v1(2400,4135)
$9N1210: U257.9 U258.11 | length 343.4
  TopLayer w6: v1(2475,4500) U258.11@2475,4585 ; U257.9@2550,4283 2550,4337.5 v1(2562.5,4350)
  MidLayer4 w6: v1(2475,4500) 2562.5,4412.5 v1(2562.5,4350)
$9N1235: U258.18 U266.13 | length 563.1
  TopLayer w6: v1(2750,5043) U266.13@2750,5117 ; U258.18@2825,4585 v1(2825,4687)
  MidLayer1 w6: v1(2750,5043) 2750,4762 v1(2825,4687)
$9N1239: R285.2 U258.1 U259.29 | length 2973
  TopLayer w6: U259.29@1790,7075 v1(1900,7075) ; v1(2925,5075) U258.1@2925,4965 2925,4898.5 2936,4887.5 v1(2962.5,4887.5)
  MidLayer4 w6: v1(1900,7075) 1912.5,7062.5 1912.5,6900 2387.5,6425 2387.5,5825 2587.5,5625 2587.5,5450 2925,5112.5 v1(2925,5075)
  MidLayer5 w6: v1(2841.5,4790) 2939,4887.5 v1(2962.5,4887.5)
  BottomLayer w6: v1(2841.5,4790) R285.2@2900,4790
$9N1242: U265.1 U265.9 | length 655.8
  TopLayer w6: v1(2500,2425) U265.1@2500,2493 ; U265.9@2850,2708 2850,2662.5 v1(2875,2637.5)
  MidLayer5 w6: v1(2500,2425) 2737.5,2425 2825,2512.5 2825,2587.5 v1(2875,2637.5)
$9N1243: U259.13 U260.25 | length 4745.7
  TopLayer w6: U260.25@2160,2575 v1(2242,2575) ; U259.13@2410,6875 v1(2492,6875)
  MidLayer1 w6: v1(2242,2575) 2287.5,2620.5 2287.5,3125 2225,3187.5 2225,3487.5 2312.5,3575 2312.5,3700 2225,3787.5 2225,4725 2250,4750 2342,4750 2387.5,4795.5 2387.5,6770.5 v1(2492,6875)
$9N1264: U259.31 U262.4 | length 5627.4
  TopLayer w6: U259.31@1790,6975 1850,6975 v1(1887.5,7012.5) ; U262.4@2650,2093 v1(2650,2175)
  MidLayer3 w6: v1(1887.5,7012.5) 2200,6700 2200,5037.5 2050,4887.5 2050,3806 v1(1925,3681)
  MidLayer4 w6: v1(1925,3681) 2000,3606 2000,3137.5 2050,3087.5 2050,2825 2225,2650 2312.5,2650 2650,2312.5 v1(2650,2175)
$9N1270: U259.32 U262.7 | length 5973.7
  TopLayer w6: U259.32@1790,6925 v1(1875,6925) ; U262.7@2800,2093 v1(2800,2167)
  MidLayer4 w6: v1(1875,6925) 1900,6900 1900,6800 2012.5,6687.5 2012.5,6612.5 2125,6500 2162.5,6500 2375,6287.5 2375,5787.5 2500,5662.5 2500,5362.5 2650,5212.5 2650,5000 2675,4975 2675,4500 3025,4150 3025,2750 3112.5,2662.5 3112.5,2500 3175,2437.5 3175,2175 3015,2015 2952,2015 v1(2800,2167)
$9N1271: U259.2 U262.6 | length 5236.4
  TopLayer w6: v1(2150,6450) U259.2@2150,6515 ; U262.6@2750,2093 v1(2750,2150)
  MidLayer1 w6: v1(2150,6450) 2037.5,6337.5 2037.5,6075 2050,6062.5 2100,6062.5 2175,5987.5 2175,5587.5 2087.5,5500 2087.5,4200 2162.5,4125 2162.5,3544.5 2200,3507 2200,3482 2187.5,3469.5 2187.5,2150 2225,2112.5 2712.5,2112.5 v1(2750,2150)
$9N1295: U261.10 U261.16 U262.2 | length 1573.8
  TopLayer w6: U262.2@2550,2093 v1(2550,2167) ; U261.16@2900,3315 2900,3150 2950,3100 U261.10@2950,2935 v1(2950,3012.5)
  BottomLayer w6: v1(2550,2167) 2900,2517 2900,2650 2887.5,2662.5 2887.5,2950 v1(2950,3012.5)
$9N1318: U260.39 U263.5 | length 844.1
  TopLayer w6: v1(1587.5,2849.5) 1600,2837 U260.39@1600,2785 ; v1(1700,3512.5) U263.5@1700,3567
  MidLayer1 w6: v1(1587.5,2849.5) 1575,2862 1575,3387.5 v1(1700,3512.5)
$9N1368: U260.9 U263.9 | length 1638.7
  TopLayer w6: U260.9@1700,2165 v1(1700,2247) ; v1(1750,3709) U263.9@1750,3783
  MidLayer1 w6: v1(1700,2247) 1725,2272 1725,3237.5 1737.5,3250 1737.5,3696.5 v1(1750,3709)
$9N1385: U260.41 U262.10 | length 1511.7
  TopLayer w6: U260.41@1540,2675 v1(1600,2675) ; v1(2800,2237.5) U262.10@2800,2308
  MidLayer6 w6: v1(1600,2675) 1875,2675 2100,2450 2362.5,2450 2575,2237.5 v1(2800,2237.5)
$9N1389: U259.43 U260.3 U261.2 | length 5969.4
  TopLayer w6: U259.43@2000,6515 v1(2000,6587.5) ; v1(2550,2837.5) U261.2@2550,2935 ; 1625,2375 U260.3@1540,2375 1625,2375 ; 1625,2375 v1(1650,2400) 1625,2375
  MidLayer3 w6: v1(1650,2400) 1737.5,2487.5 1737.5,2800 1775,2837.5 1775,3337.5 1825,3387.5 1825,4212.5 1712.5,4325 1712.5,4587.5 1650,4650 1650,5912.5 1850,6112.5 1850,6437.5 v1(2000,6587.5)
  MidLayer5 w6: v1(1650,2400) 2025,2775 2250,2775 2312.5,2837.5 v1(2550,2837.5)
  other v1: 1650,2400
$9N1394: U14.13 U121.6 U260.43 | length 2699.4
  TopLayer w6: U260.43@1540,2575 v1(1687.5,2575) ; v1(2750,4213) 2775,4238 U14.13@2775,4283 ; 2175,3604 U121.6@2175,3567 2175,3604 ; 2175,3604 2183.5,3612.5 ; 2175,3604 2183.5,3612.5 ; 2183.5,3612.5 2221.5,3612.5 ; 2183.5,3612.5 2221.5,3612.5 ; 2221.5,3612.5 v1(2250,3641) 2221.5,3612.5
  MidLayer2 w6: v1(2250,3641) 2575,3966 2575,4175 2600,4200 2737,4200 v1(2750,4213)
  BottomLayer w6: v1(1687.5,2575) 1687.5,2875 2012.5,3200 2012.5,3362.5 2025,3375 2125,3375 2150,3400 2150,3541 v1(2250,3641)
  other v1: 2250,3641
$9N1441: U261.3 U261.23 | length 428.7
  TopLayer w6: v1(2525,3237.5) 2537.5,3237.5 2550,3250 U261.23@2550,3315 ; U261.3@2600,2935 v1(2600,3052)
  MidLayer2 w6: v1(2525,3237.5) 2525,3127 v1(2600,3052)
$9N1443: U261.4 U261.22 | length 400.7
  TopLayer w6: U261.22@2600,3315 2600,3150 2650,3100 U261.4@2650,2935
$9N1445: U261.5 U261.21 | length 400.7
  TopLayer w6: U261.21@2650,3315 2650,3150 2700,3100 U261.5@2700,2935
$9N1448: U261.6 U261.20 | length 400.7
  TopLayer w6: U261.20@2700,3315 2700,3150 2750,3100 U261.6@2750,2935
$9N1450: U261.7 U261.19 | length 400.7
  TopLayer w6: U261.19@2750,3315 2750,3150 2800,3100 U261.7@2800,2935
$9N1453: U261.8 U261.18 | length 400.7
  TopLayer w6: U261.18@2800,3315 2800,3150 2850,3100 U261.8@2850,2935
$9N1455: U261.9 U261.17 | length 400.7
  TopLayer w6: U261.17@2850,3315 2850,3150 2900,3100 U261.9@2900,2935
$9N1458: U261.11 U261.15 | length 400.7
  TopLayer w6: U261.15@2950,3315 2950,3150 3000,3100 U261.11@3000,2935
$9N1481: U262.13 U262.14 U262.15 | length 231.1
  TopLayer w6: U262.15@2550,2308 2550,2277.5 2552.5,2275 2597.5,2275 ; U262.13@2650,2308 2650,2277.5 2647.5,2275 2597.5,2275 ; 2597.5,2275 2600,2277.5 ; 2597.5,2275 2600,2277.5 ; 2600,2277.5 U262.14@2600,2308 2600,2277.5
$9N1482: U260.4 U262.5 U262.11 U268.7 | length 3357.7
  TopLayer w6: U268.7@1600,3407 1600,3375 v1(1625,3350) ; U262.5@2700,2093 2700,2225 2725,2225 ; v1(1687.5,2325) U260.4@1540,2325 v1(1687.5,2325) ; v1(1687.5,2325) 1737.5,2275 1775,2275 1775,2115 1777.5,2112.5 1822.5,2112.5 1825,2115 1825,2275 1850,2300 2462.5,2300 2475,2287.5 2475,2162.5 2497.5,2140 2502.5,2140 2525,2162.5 2525,2187.5 2562.5,2225 2725,2225 ; 2725,2225 2750,2250 ; 2725,2225 2750,2250 ; 2750,2250 U262.11@2750,2308 2750,2250
  MidLayer1 w6: v1(1625,3350) 1625,2800 1712.5,2712.5 1712.5,2350 v1(1687.5,2325)
$9N1576: R279.2 U264.2 U264.7 | length 611.2
  TopLayer w6: v1(1025,3110) 1035,3100 1125,3100 1150,3125 U264.2@1150,3193 1150,3150 1387.5,3150 1400,3162.5 U264.7@1400,3193
  BottomLayer w6: R279.2@950,3110 v1(1025,3110)
$9N1577: R281.2 U264.1 U264.9 | length 880.4
  TopLayer w6: U264.1@1100,3193 1100,3137.5 v1(1112.5,3125) ; 1450,3484 U264.9@1450,3408 1450,3484 ; 1450,3484 v1(1462.5,3496.5) 1450,3484
  BottomLayer w6: v1(1112.5,3125) 1137.5,3150 1162.5,3150 1237.5,3225 1237.5,3275 1262.5,3300 1266,3300 v1(1462.5,3496.5) 1450,3484 R281.2@1450,3415
  other v1: 1462.5,3496.5
$9N1587: U264.14 U268.6 | length 672.7
  TopLayer w6: U264.14@1200,3408 1200,3450 1212.5,3462.5 1312.5,3462.5 1325,3450 1325,3375 1337.5,3362.5 1550,3362.5 1587.5,3325 1637.5,3325 1650,3337.5 U268.6@1650,3407
$9N1589: U264.13 U268.5 | length 596.1
  TopLayer w6: U264.13@1250,3408 1250,3362.5 v1(1262.5,3350) ; v1(1700,3337.5) U268.5@1700,3407
  MidLayer2 w6: v1(1262.5,3350) 1450,3350 1475,3375 1662.5,3375 v1(1700,3337.5)
$9N1591: U264.12 U268.4 | length 624.1
  TopLayer w6: U264.12@1300,3408 1300,3362.5 1325,3337.5 1537.5,3337.5 1587.5,3287.5 1712.5,3287.5 1750,3325 U268.4@1750,3407
$9N1593: R291.2 U268.3 U268.10 U268.11 U268.12 U268.13 | length 726
  TopLayer w6: U268.10@1600,3192 1600,3222.5 1602.5,3225 1650,3225 ; v1(1650,3250) U268.11@1650,3192 ; U268.3@1800,3407 1800,3312.5 1750,3262.5 U268.13@1750,3192 1750,3225 1702.5,3225 1700,3227.5 ; U268.11@1650,3192 1650,3225 ; U268.11@1650,3192 1650,3225 ; 1650,3225 1675,3250 1677.5,3250 1700,3227.5 ; 1700,3227.5 U268.12@1700,3192 1700,3227.5
  BottomLayer w6: R291.2@1650,3190 v1(1650,3250)
$9N1605: U268.1 U268.15 | length 235.7
  TopLayer w6: U268.15@1850,3192 1850,3262.5 1900,3312.5 U268.1@1900,3407
$10N712: J4.20 U4.15 U9.5 | length 6909.9
  TopLayer w6: U4.15@1310,8075 v1(1512.5,8075) ; U9.5@4825,4942 v1(4825,5012.5)
  MidLayer4 w6: J4.20@1950,8900 2000,8850 2175,8850 2200,8825 2200,8787.5 2712.5,8275 2937.5,8275 2962.5,8250 2962.5,8087.5 2900,8025 2900,7987.5 2912.5,7975 2925,7975 3125,7775 3125,7575 3425,7275 3425,7237.5 3437.5,7225 3475,7225 3625,7075 3625,7012.5 3862.5,6775 3862.5,6075 4425,5512.5 4425,5487.5 4662.5,5250 4662.5,5070.5 4675.5,5057.5 4700,5057.5 4707.5,5050 4787.5,5050 v1(4825,5012.5)
  MidLayer5 w6: v1(1512.5,8075) 1512.5,8212.5 1550,8250 1550,8500 1575,8525 1875,8525 1900,8550 1900,8850 J4.20@1950,8900
$10N885: U18.2 U18.8 | length 439.7
  TopLayer w6: U18.2@1500,4092 v1(1500,4162.5) ; v1(1750,4250) U18.8@1750,4308
  MidLayer5 w6: v1(1500,4162.5) 1512.5,4150 1637.5,4150 1650,4162.5 1650,4187.5 1675,4212.5 1712.5,4212.5 v1(1750,4250)
$10N891: U17.3 U18.13 | length 4105.5
  TopLayer w6: U18.13@1500,4308 v1(1500,4375) ; U17.3@3650,6942 v1(3650,7037.5)
  BottomLayer w6: v1(1500,4375) 1650,4525 1762.5,4525 1837.5,4600 1962.5,4600 1987.5,4625 1987.5,4837.5 2237.5,5087.5 2237.5,5337.5 2487.5,5587.5 2487.5,5796.5 2537.5,5846.5 2537.5,5961.5 2551,5975 2612.5,5975 2637.5,6000 2637.5,6287.5 3300,6950 3300,7036.5 3313.5,7050 3637.5,7050 v1(3650,7037.5)
$10N1426: R3.2 U16.10 U16.12 U303.4 U303.10 | length 3919.2
  TopLayer w6: U303.4@2900,3567 2900,3650 ; 775,3709 U16.12@775,3808 775,3709 ; 775,3709 v1(800,3684) 775,3709 ; v1(875,3734) U16.10@875,3808 v1(875,3734) ; v1(875,3734) 950,3659 950,3555 955,3550 995,3550 1000,3555 1000,3674.5 1013,3687.5 1287.5,3687.5 1300,3675 1362.5,3675 1375,3662.5 1375,3537.5 1387.5,3525 1412.5,3525 1425,3537.5 1425,3600 1500,3675 1881,3675 1900,3656 1937.5,3656 1950,3668.5 1950,3687.5 1987.5,3725 2087.5,3725 2125,3687.5 2741,3687.5 2762.5,3666 2762.5,3637.5 2725,3600 2725,3532.5 2782.5,3475 2822.5,3475 2875,3527.5 2875,3625 2900,3625 2900,3650 ; 2900,3650 2950,3700 ; 2900,3650 2950,3700 ; 2950,3700 U303.10@2950,3783 2950,3700
  MidLayer5 w6: v1(800,3684) 825,3684 v1(875,3734)
  BottomLayer w6: R3.2@775,3735 775,3709 v1(800,3684)
  other v1: 800,3684
$10N1487: J4.16 U4.11 U11.33 U18.6 | length 5457.3
  TopLayer w6: v1(1500,4925) U11.33@1615,4925 v1(1712.5,4925) ; U18.6@1700,4092 1700,4137 v1(1738,4175) ; U4.11@1310,7875 v1(1392,7875) U4.11@1310,7875
  MidLayer1 w6: v1(1392,7875) 1437.5,7829.5 1437.5,6800 1425,6787.5 1425,6762.5 1450,6737.5 1450,5927 1435.5,5912.5 1435.5,4989.5 v1(1500,4925) ; v1(1712.5,4925) 1762.5,4875 1762.5,4300 1725,4262.5 1725,4188 v1(1738,4175)
  BottomLayer w6: v1(1392,7875) 1700,8183 1700,8850 J4.16@1750,8900
  other v1: 1392,7875
$10N1488: J4.40 U4.27 U10.19 | length 2865.3
  TopLayer w6: v1(800,8062.5) U4.27@800,8235 ; v1(2125,8300) 2225,8300 2250,8275 ; v1(2512.5,8300) 2275,8300 2250,8275 ; 2250,8275 U10.19@2250,8235 2250,8275
  MidLayer2 w6: v1(800,8062.5) 1162.5,8062.5 1375,8275 2100,8275 v1(2125,8300)
  MidLayer5 w6: v1(2512.5,8300) 2900,8687.5 2900,8850 J4.40@2950,8900
$10N1491: U4.18 U16.11 | length 12744.2
  TopLayer w6: U16.11@825,3808 v1(825,3882) ; v1(1250,8100) U4.18@1250,8235
  MidLayer1 w6: v1(825,3882) 825,5775 800,5800 800,6153.5 725,6228.5 725,6652.5 747.5,6675 775,6675 787.5,6662.5 787.5,6250 824.5,6213 824.5,5975 849.5,5950 900,5950 925,5975 925,6525 987.5,6587.5 987.5,6654.5 925,6717 925,7100 950,7125 987.5,7125 1012.5,7100 1012.5,6462.5 950,6400 950,5225 912.5,5187.5 912.5,4450 1012.5,4350 1012.5,3975 1025,3962.5 1075,3962.5 1112.5,4000 1112.5,4344 1250,4481.5 1250,6837.5 1187.5,6900 1187.5,8037.5 v1(1250,8100)
$10N1493: U4.14 U5.2 U19.1 | length 6381.5
  TopLayer w6: U5.2@700,4092 v1(700,4212.5) ; U4.14@1310,8025 v1(1392,8025) ; 2900,5443 2925,5468 ; 2900,5443 v1(2900,5418) 2900,5443 ; 2900,5443 2925,5468 ; 2925,5468 U19.1@2925,5517 2925,5468
  MidLayer4 w6: v1(1392,8025) 2450,6967 2450,6087.5 2900,5637.5 v1(2900,5418)
  MidLayer5 w6: v1(700,4212.5) 700,4262.5 712.5,4275 1100,4275 1575,4750 1875,4750 1987.5,4862.5 2037.5,4862.5 2525,5350 2832,5350 v1(2900,5418)
  other v1: 2900,5418
$10N1501: U4.2 U10.9 | length 1581.1
  TopLayer w6: U4.2@1050,7615 v1(1050,7700) ; U10.9@2360,7775 v1(2437.5,7775)
  MidLayer5 w6: v1(1050,7700) 1125,7775 v1(2437.5,7775)
$10N1502: J4.12 U4.20 U10.8 | length 2692.6
  TopLayer w6: U10.8@2360,7725 v1(2442,7725) ; v1(1150,8128) U4.20@1150,8235 v1(1150,8128)
  MidLayer6 w6: v1(1150,8128) 1228,8050 1950,8050 2275,7725 v1(2442,7725)
  BottomLayer w6: v1(1150,8128) 1500,8478 1500,8850 J4.12@1550,8900
  other v1: 1150,8128
$10N1524: U10.2 U18.11 | length 3555.5
  TopLayer w6: U18.11@1600,4308 v1(1600,4387.5) ; v1(2100,7537.5) U10.2@2100,7615
  MidLayer3 w6: v1(1550,6835) 1600,6785 v1(1600,4387.5)
  BottomLayer w6: v1(1550,6835) 1550,6987.5 v1(2100,7537.5)
$10N1528: U10.21 U11.3 | length 3742.5
  TopLayer w6: U11.3@2025,4565 v1(2025,4647) ; v1(2150,8153) U10.21@2150,8235
  MidLayer1 w6: v1(2025,4647) 2050,4672 2050,4850 2025,4875 2025,8028 v1(2150,8153)
$10N1583: R1.2 U3.1 U303.1 U303.13 | length 2972.2
  TopLayer w6: U303.1@2750,3567 2750,3600 2762.5,3600 v1(2800,3637.5) ; 1050,3634 1075,3659 ; 1050,3634 U3.1@1050,3568 1050,3634 ; 1050,3634 1075,3659 ; 1075,3659 v1(1137.5,3659) 1075,3659 ; v1(2800,3637.5) U303.13@2800,3783 v1(2800,3637.5)
  MidLayer4 w6: v1(1137.5,3659) 1196.5,3600 1562.5,3600 1587.5,3625 1587.5,3787.5 1687.5,3887.5 1862.5,3887.5 2025,4050 2075,4050 2450,3675 2625,3675 2650,3650 2687.5,3650 2737.5,3600 2762.5,3600 v1(2800,3637.5)
  BottomLayer w6: R1.2@1100,3590 1137.5,3627.5 v1(1137.5,3659)
  other v1: 1137.5,3659
$10N1614: R5.2 U5.1 U5.13 | length 400.4
  TopLayer w6: U5.13@700,4308 700,4250 637.5,4187.5 v1(637.5,4162.5) ; v1(637.5,4162.5) 650,4150 ; v1(637.5,4162.5) 650,4150 ; 650,4150 U5.1@650,4092 650,4150
  BottomLayer w6: v1(637.5,4162.5) 650,4150 R5.2@650,4090
$10N1615: U5.4 U5.10 | length 236.7
  TopLayer w6: U5.4@800,4092 800,4175 850,4225 U5.10@850,4308
$10N1645: U6.19 U16.9 | length 1490.9
  TopLayer w6: U16.9@925,3808 v1(925,3882) ; v1(1175,5100) U6.19@1175,5185
  MidLayer3 w6: v1(925,3882) 912.5,3894.5 912.5,4837.5 v1(1175,5100)
$10N1653: U2.4 U4.10 U17.10 U241.1 | length 7583.2
  TopLayer w6: v1(1225,6750) v1(1225,6662.5) ; U4.10@1310,7825 v1(1387.5,7825) ; v1(1850,4162.5) 1875,4137.5 U241.1@1875,4092 ; U17.10@3750,7158 3750,7100 v1(3762.5,7087.5) ; U2.4@1150,6540 v1(1150,6622) ; U2.4@1150,6540 v1(1150,6622) ; U2.4@1150,6540 v1(1150,6622) ; v1(1150,6622) 1190.5,6662.5 ; v1(1150,6622) 1190.5,6662.5 ; 1190.5,6662.5 v1(1225,6662.5) ; 1190.5,6662.5 v1(1225,6662.5)
  MidLayer3 w6: v1(1225,6750) 1225,6800 1275,6850 1275,7712.5 v1(1387.5,7825) ; v1(1725,5687.5) 1700,5662.5 1700,5062.5 1762.5,5000 1762.5,4600 1862.5,4500 1862.5,4175 v1(1850,4162.5)
  MidLayer4 w6: v1(1150,6622) 1225,6547 1225,6400 1725,5900 v1(1725,5687.5)
  MidLayer5 w6: v1(1225,6662.5) 1250,6637.5 1982.5,6637.5 2120,6775 2237.5,6775 2287.5,6825 2450,6825 2487.5,6787.5 2900,6787.5 2937.5,6750 2962.5,6750 3062.5,6850 3350,6850 3362.5,6837.5 3400,6837.5 3412.5,6850 3412.5,7025 3437.5,7050 3562.5,7050 3600,7087.5 v1(3762.5,7087.5)
$10N1655: U6.4 U11.6 | length 1296.8
  TopLayer w6: U6.4@1125,4565 1125,4637.5 1187.5,4700 1329.5,4700 1354.5,4725 1400,4725 1425,4700 2162.5,4700 2175,4687.5 U11.6@2175,4565
$10N1657: U6.9 U11.27 | length 685
  TopLayer w6: U6.9@1285,4725 1325,4725 v1(1375,4775) ; v1(1725,5092) U11.27@1725,5185
  BottomLayer w6: v1(1375,4775) 1408,4775 v1(1725,5092)
$10N1658: U6.7 U11.26 | length 811
  TopLayer w6: U6.7@1285,4625 v1(1367,4625) ; v1(1775,5103) U11.26@1775,5185
  BottomLayer w6: v1(1367,4625) 1575,4833 1575,4903 v1(1775,5103)
$10N1659: U6.2 U11.18 | length 1550.3
  TopLayer w6: U6.2@1025,4565 v1(1025,4687.5) ; v1(2175,5125) U11.18@2175,5185
  MidLayer5 w6: v1(1025,4687.5) 1187.5,4850 1575,4850 1625,4900 2012.5,4900 2175,5062.5 v1(2175,5125)
$10N1660: U6.5 U11.19 | length 1313.7
  TopLayer w6: U6.5@1175,4565 v1(1175,4625) ; v1(2125,5062.5) U11.19@2125,5185
  MidLayer2 w6: v1(1175,4625) 1300,4750 1812.5,4750 v1(2125,5062.5)
$10N1670: U6.24 U87.1 | length 3153.3
  TopLayer w6: v1(912.5,5262.5) 922.5,5262.5 925,5260 U6.24@925,5185 ; U87.1@3225,6158 v1(3225,6225)
  MidLayer5 w6: v1(912.5,5262.5) 850,5200 850,5387.5 875,5412.5 1325,5412.5 1725,5812.5 1925,5812.5 2012.5,5900 2162.5,5900 2450,6187.5 2775,6187.5 2812.5,6225 v1(3225,6225)
$10N1672: U8.2 U241.2 | length 1756.2
  TopLayer w6: U8.2@700,3192 v1(700,3266) ; U241.2@1925,4092 v1(1925,4163)
  MidLayer5 w6: v1(700,3266) 871.5,3437.5 1025,3437.5 1162.5,3575 1237.5,3575 1337.5,3675 1337.5,3700 1700,4062.5 1824.5,4062.5 v1(1925,4163)
$10N1674: U8.1 U303.9 | length 2775.7
  TopLayer w6: U8.1@650,3192 v1(650,3266) ; v1(3000,3709) U303.9@3000,3783
  MidLayer2 w6: v1(650,3266) 691,3225 1487.5,3225 1562.5,3300 1775,3300 2000,3525 2375,3525 2450,3600 2450,3662.5 2462.5,3675 2662.5,3675 2725,3737.5 2971.5,3737.5 v1(3000,3709)
$10N1679: U5.12 U9.6 | length 4665.4
  TopLayer w6: U5.12@750,4308 v1(750,4382) ; v1(4875,4887.5) U9.6@4875,4942
  MidLayer2 w6: v1(750,4382) 932,4200 1287.5,4200 1350,4137.5 2175,4137.5 2362.5,4325 2575,4325 2587.5,4337.5 3762.5,4337.5 3887.5,4462.5 3991.5,4462.5 4179,4650 4337.5,4650 4400,4712.5 4637.5,4712.5 4812.5,4887.5 v1(4875,4887.5)
$10N1743: U11.16 U19.5 | length 1206.4
  TopLayer w6: U11.16@2235,5075 v1(2450,5075) ; U19.5@3125,5517 v1(3125,5575)
  MidLayer5 w6: v1(2450,5075) 2525,5150 2525,5237.5 2587.5,5300 2800,5300 2887.5,5387.5 2921.5,5387.5 3109,5575 v1(3125,5575)
$10N1790: U6.8 U11.5 | length 970.7
  TopLayer w6: U6.8@1285,4675 1363,4675 v1(1388,4700) ; U11.5@2125,4565 v1(2125,4675)
  MidLayer2 w6: v1(1388,4700) 2100,4700 v1(2125,4675)
$10N1822: J4.10 U4.26 U10.20 U11.10 | length 6131.5
  TopLayer w6: U4.26@850,8235 v1(850,8312.5) ; U11.10@2235,4775 v1(2317,4775) ; v1(2200,8075) U10.20@2200,8235 v1(2200,8075)
  MidLayer1 w6: v1(2200,8075) 2375,7900 2375,5362.5 2275,5262.5 2275,4817 v1(2317,4775)
  MidLayer4 w6: J4.10@1450,8900 1500,8850 1500,8650 2075,8075 v1(2200,8075)
  MidLayer5 w6: v1(850,8312.5) 1150,8312.5 1400,8562.5 1400,8850 J4.10@1450,8900
  other v1: 2200,8075
$10N1841: U14.1 U87.8 | length 2242.5
  TopLayer w6: U14.1@2725,4067 v1(2725,4125) ; v1(2900,5850) 2922.5,5850 2925,5852.5 U87.8@2925,5942
  MidLayer1 w6: v1(2725,4125) 2750,4100 2875,4100 2887.5,4112.5 2887.5,4160.5 2875,4173 2875,4250 3000,4375 3000,4525 3012.5,4537.5 3012.5,4800 2912.5,4900 2912.5,5050 2846,5116.5 2846,5796 v1(2900,5850)
$10N1843: U8.13 U14.3 U304.5 | length 3467.4
  TopLayer w6: U8.13@700,3408 700,3325 719,3306 1031.5,3306 1087.5,3250 1125,3250 1187.5,3312.5 1387.5,3312.5 1425,3275 1725,3275 1775,3325 1775,3437.5 1862.5,3525 2262.5,3525 2325,3587.5 2325,3637.5 2362.5,3675 2566,3675 v1(2600,3641) 2556.5,3597.5 2550,3597.5 U304.5@2550,3567 ; v1(2825,3903.5) U14.3@2825,4067 v1(2825,3903.5)
  BottomLayer w6: 2600,3666 v1@2825,3891 ; 2600,3666 v1(2600,3641) 2600,3666 ; 2600,3666 v1@2825,3891 ; v1@2825,3891 v1(2825,3903.5) v1@2825,3891
  other v1: 2600,3641 2825,3903.5
$10N1854: U1.1 U15.8 | length 445.7
  TopLayer w6: U15.8@2775,5733 2775,5825 2750,5850 2750,6037.5 2775,6062.5 U1.1@2775,6158
$10N1856: U1.8 U15.10 | length 467.1
  TopLayer w6: v1(2475,5887.5) U1.8@2475,5942 ; v1(2675,5659) U15.10@2675,5733
  MidLayer4 w6: v1(2475,5887.5) 2487.5,5875 2487.5,5800 2512.5,5775 2559,5775 v1(2675,5659)
$10N1858: U1.5 U1.12 | length 405.4
  TopLayer w6: U1.5@2575,6158 v1(2575,6232) ; U1.12@2675,5942 v1(2675,6012.5)
  MidLayer4 w6: v1(2575,6232) 2625,6182 2625,6062.5 v1(2675,6012.5)
$10N1860: U1.3 U4.25 | length 3232
  TopLayer w6: v1(900,8153) U4.25@900,8235 ; v1(2675,6087.5) U1.3@2675,6158
  MidLayer4 w6: v1(900,8153) 947,8200 1262.5,8200 2637.5,6825 2637.5,6125 v1(2675,6087.5)
$10N1893: U6.18 U15.11 | length 1721
  TopLayer w6: U6.18@1225,5185 v1(1225,5275) ; v1(2625,5662.5) U15.11@2625,5733
  MidLayer5 w6: v1(1225,5275) 1262.5,5312.5 1625,5312.5 1862.5,5550 2325,5550 2437.5,5662.5 v1(2625,5662.5)
$10N1902: U15.12 U17.8 | length 2301.2
  TopLayer w6: U15.12@2575,5733 2575,5775 2600,5800 v1(2612.5,5800) ; v1(3850,7050) U17.8@3850,7158
  BottomLayer w6: v1(2612.5,5800) 2712.5,5900 2866.5,5900 2887.5,5921 2887.5,6150 3150,6412.5 3150,6612.5 3375,6837.5 3425,6837.5 3448.5,6861 3448.5,6955.5 3518,7025 3537.5,7025 3587.5,6975 3650,6975 3725,7050 v1(3850,7050)
$10N1904: U4.24 U15.13 | length 3165.2
  TopLayer w6: v1(950,8153) U4.24@950,8235 ; U15.13@2525,5733 2525,5787 v1(2538,5800)
  MidLayer4 w6: v1(950,8153) 1925,7178 1925,6975 2425,6475 2425,6075 2512.5,5987.5 2512.5,5825.5 v1(2538,5800)
$10N1906: U14.2 U87.3 | length 2267
  TopLayer w6: U14.2@2775,4067 v1(2775,4162.5) ; U87.3@3125,6158 3125,6087.5 v1(3150,6062.5)
  MidLayer3 w6: v1(2775,4162.5) 2775,4600 2987.5,4812.5 2987.5,4912.5 3000,4925 3000,5625 3162.5,5787.5 3162.5,5825 3150,5837.5 v1(3150,6062.5)
$10N1909: U6.25 U87.2 | length 2792.7
  TopLayer w6: U6.25@875,5185 v1(875,5280) ; v1(3175,6100) U87.2@3175,6158
  MidLayer5 w6: v1(875,5280) 932.5,5337.5 1312.5,5337.5 1600,5625 1837.5,5625 2087.5,5875 2325,5875 2437.5,5987.5 3025,5987.5 3125,6087.5 3162.5,6087.5 v1(3175,6100)
$10N1955: U14.6 U87.9 | length 1988.9
  TopLayer w6: U14.6@2975,4067 2975,4100 v1(3000,4125) ; U87.9@2975,5942 2975,5900 v1(3000,5875)
  MidLayer1 w6: v1(3000,4125) 3100,4225 3100,4812.5 3075,4837.5 3075,5087.5 3087.5,5100 3087.5,5500 3000,5587.5 v1(3000,5875)
$10N1961: U15.3 U16.2 | length 3188
  TopLayer w6: U16.2@725,3592 v1(725,3654) ; v1(2012.5,4819.5) 2012.5,5075 1950,5137.5 1950,5275 2100,5425 2550,5425 2575,5450 U15.3@2575,5517
  MidLayer5 w6: v1(725,3654) 883.5,3812.5 987.5,3812.5 1287.5,4112.5 1287.5,4300 1700,4712.5 1905.5,4712.5 v1(2012.5,4819.5)
$10N1967: U15.6 U16.1 | length 3555.4
  TopLayer w6: v1(650,3540) 662.5,3540 675,3552.5 U16.1@675,3592 ; U15.6@2725,5517 2725,5562.5 v1(2737.5,5575)
  MidLayer5 w6: v1(650,3540) 650,4050 675,4075 675,4387.5 1262.5,4975 1612.5,4975 1625,4962.5 1737.5,4962.5 1862.5,5087.5 1931.5,5087.5 2031.5,5187.5 2225,5187.5 2462.5,5425 2587.5,5425 v1(2737.5,5575)
$10N1978: U2.38 U8.11 | length 3370
  TopLayer w6: U2.38@690,6650 v1(760,6650) ; U8.11@800,3408 v1(800,3475)
  MidLayer1 w6: v1(760,6650) 762.5,6647.5 762.5,6250 812.5,6200 812.5,5912.5 837.5,5887.5 837.5,5437.5 850,5425 850,3525 v1(800,3475)
$10N2014: U303.5 U303.12 | length 274.1
  TopLayer w6: v1(2850,3712.5) U303.12@2850,3783 ; U303.5@2950,3567 v1(2950,3641)
  MidLayer6 w6: v1(2850,3712.5) 2878.5,3712.5 v1(2950,3641)
$11N88: R58.2 U28.1 | length 148.1
  TopLayer w6: U28.1@1025,4093 1025,4135 v1(1040,4150)
  BottomLayer w6: v1(1040,4150) R58.2@1100,4090